# EAGLE board SparkFun_GNSS_mosaic-X5-Panel (EAGLE 9.6.2), part 1 of 3
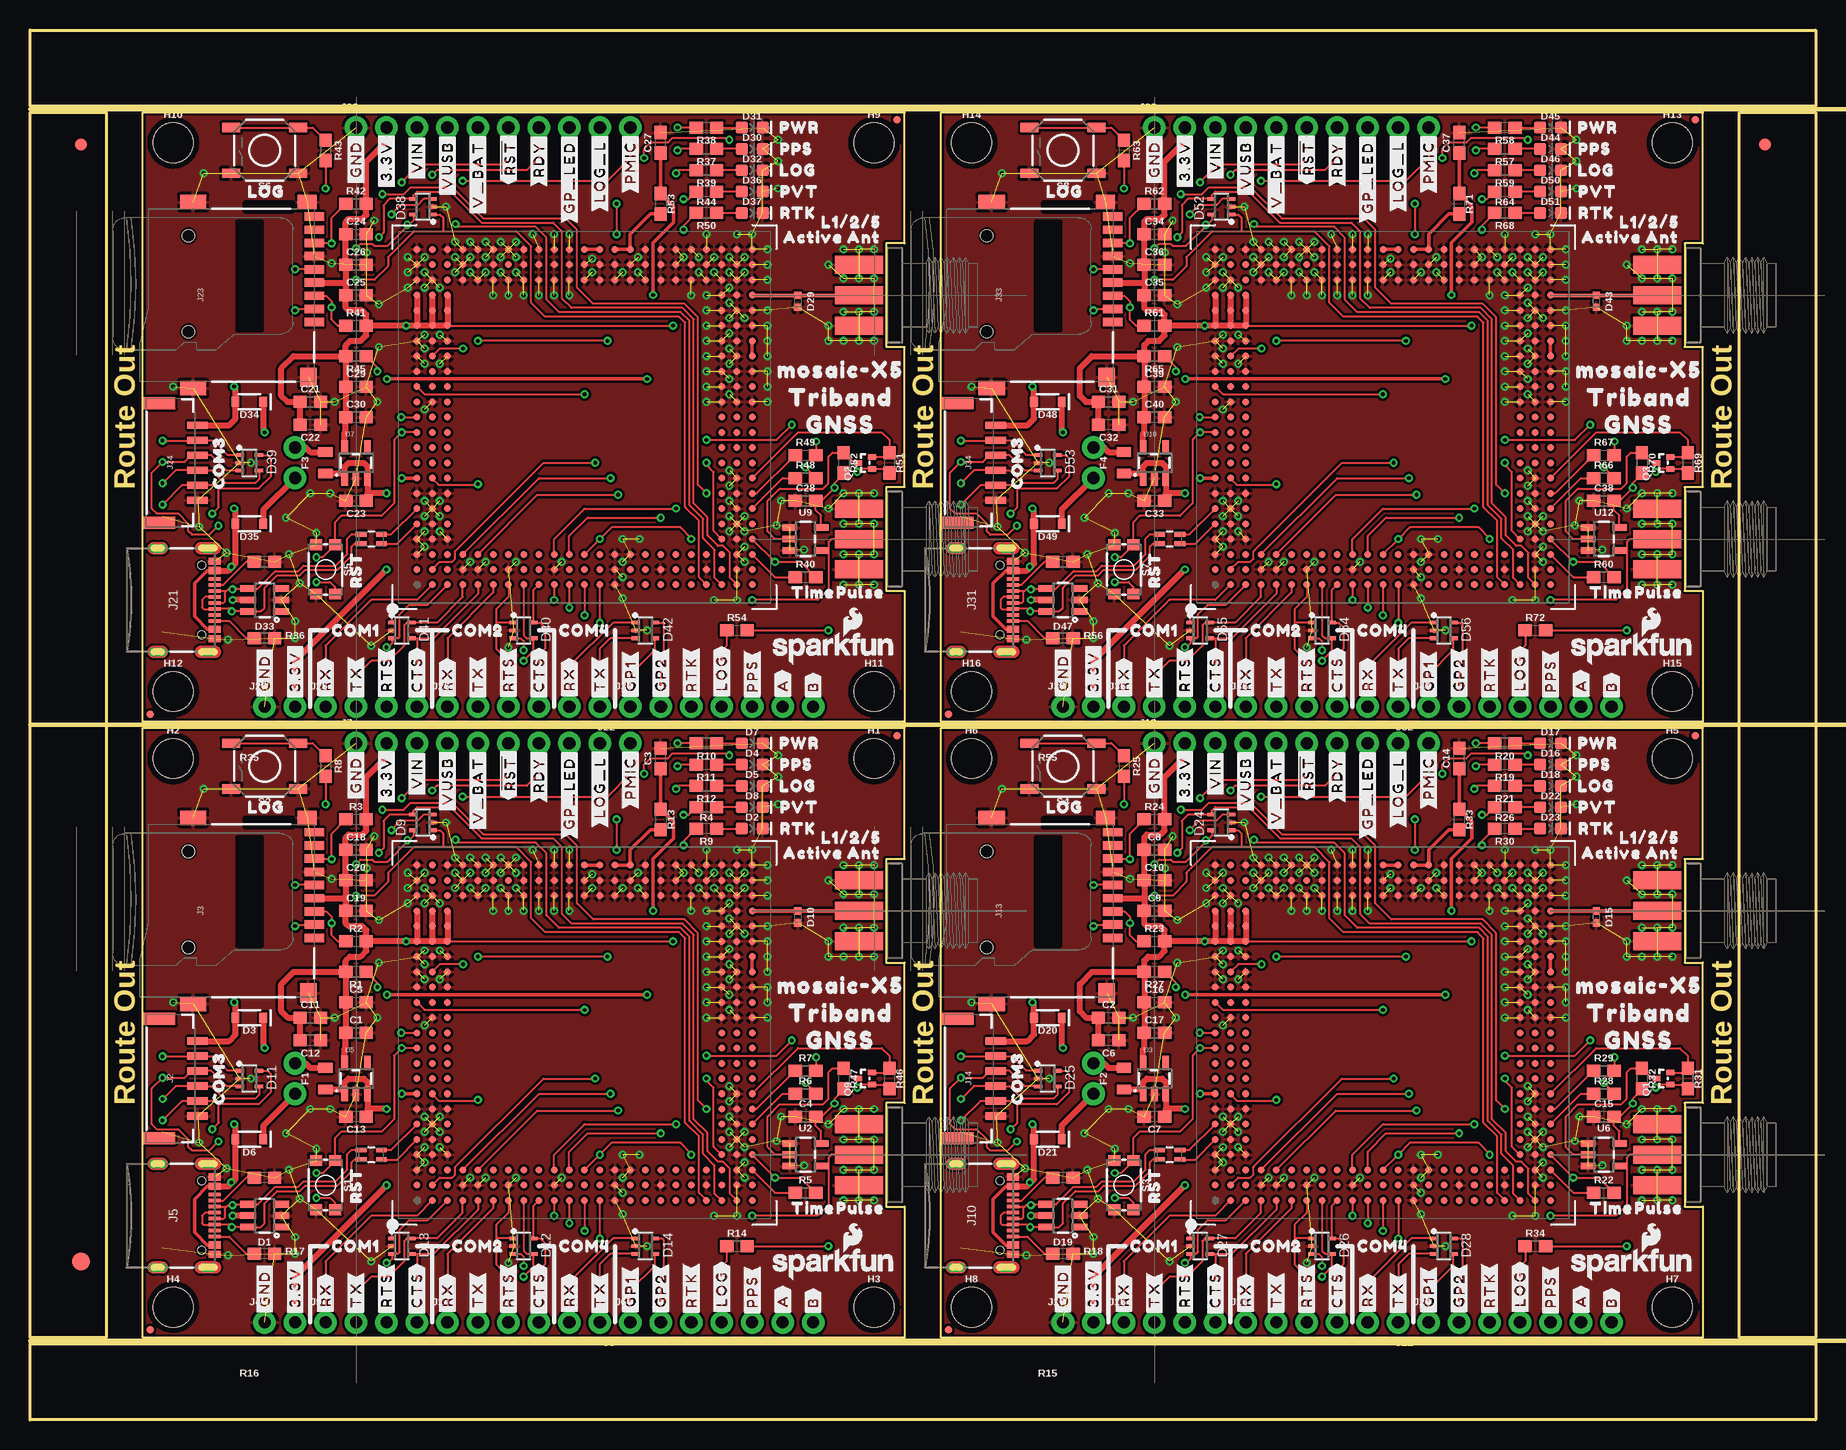
[diagram p0: board, top side]
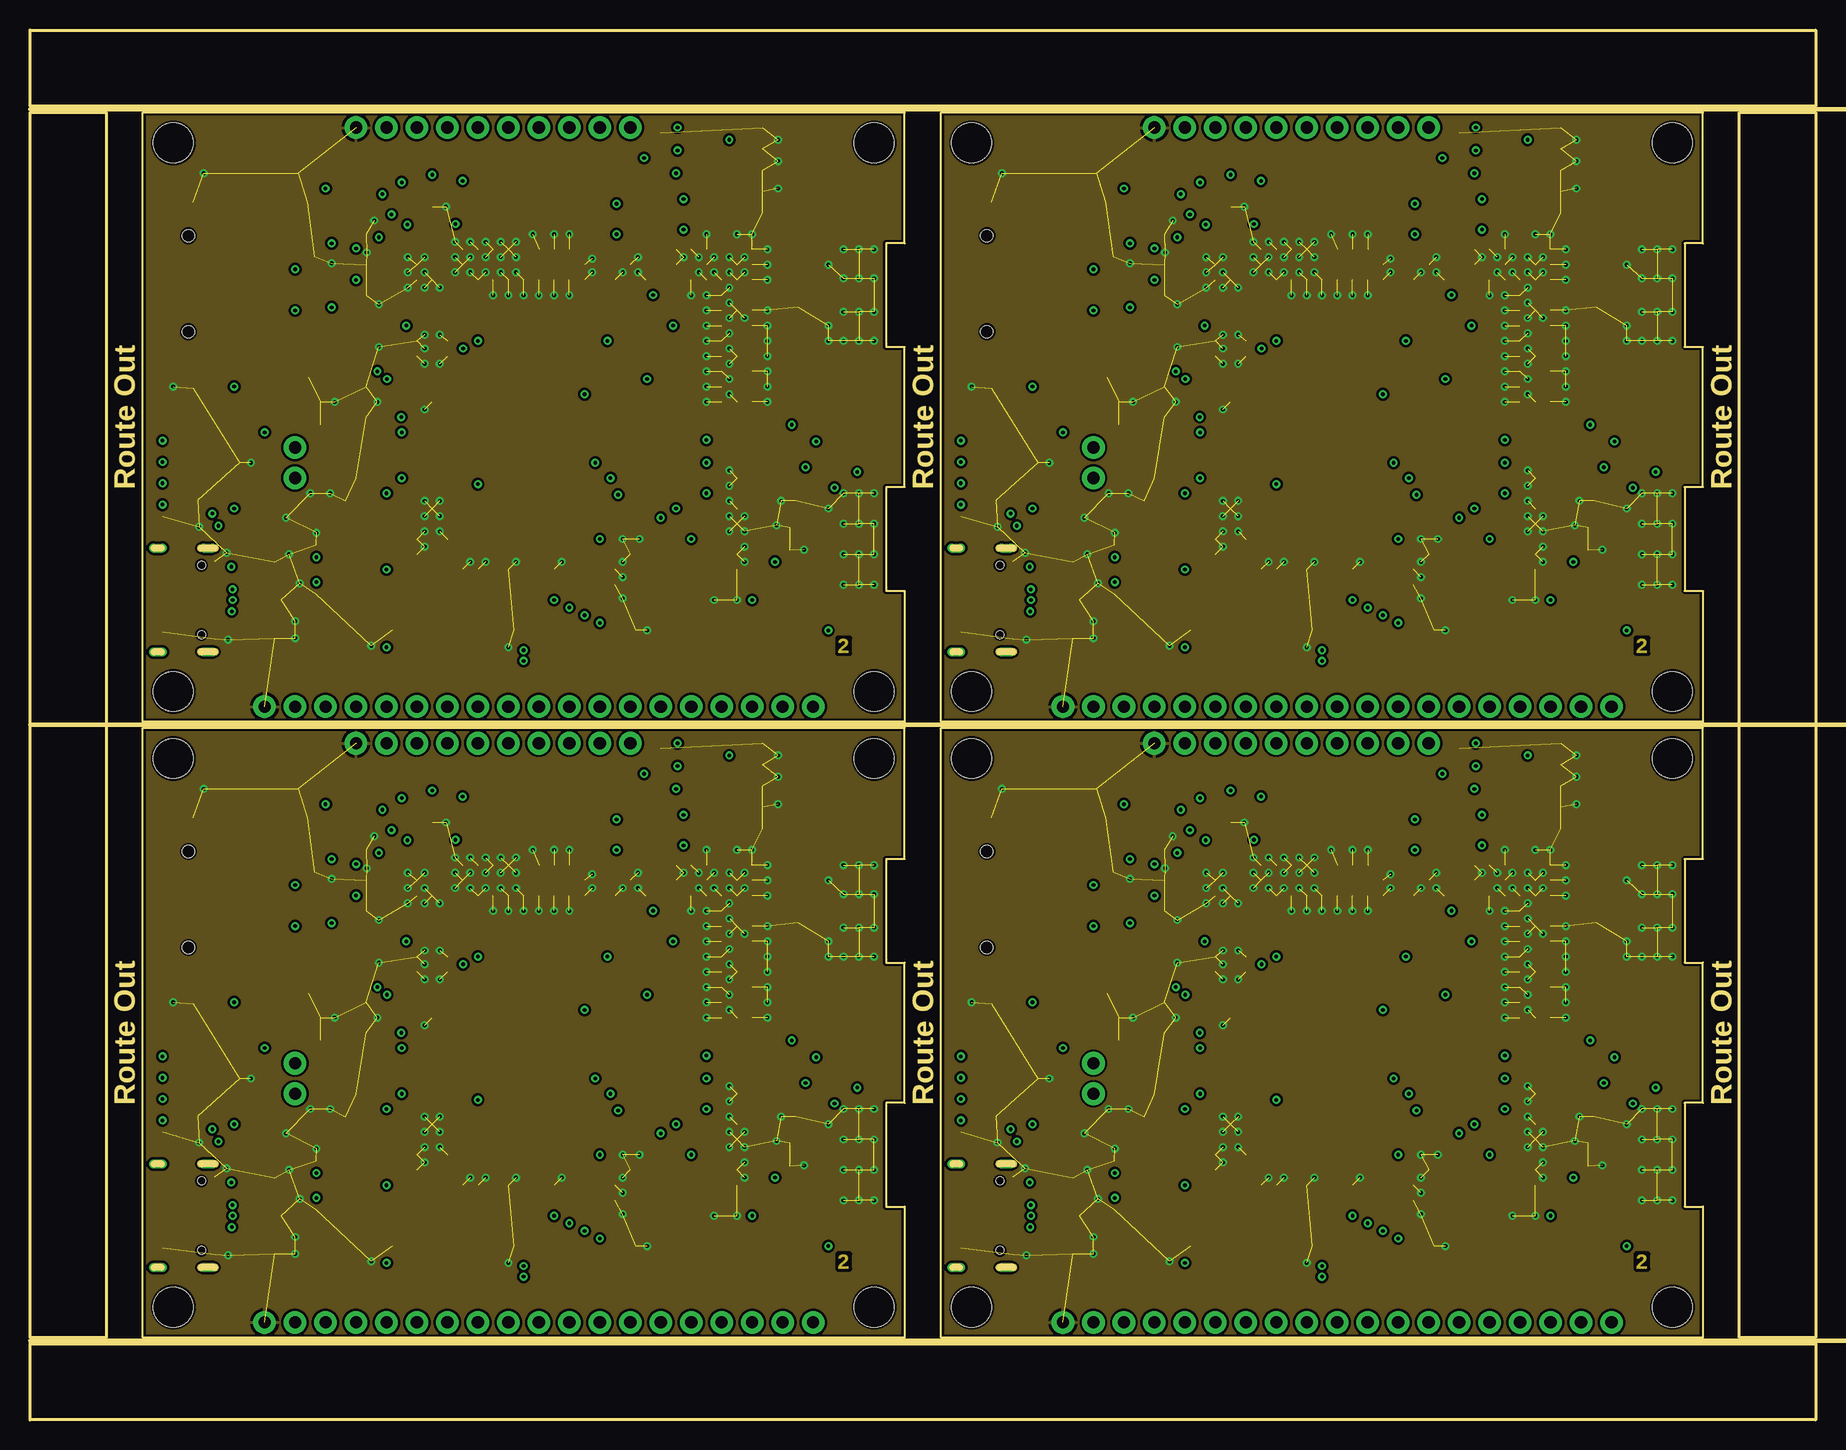
[diagram p1: board, inner layer Route2]
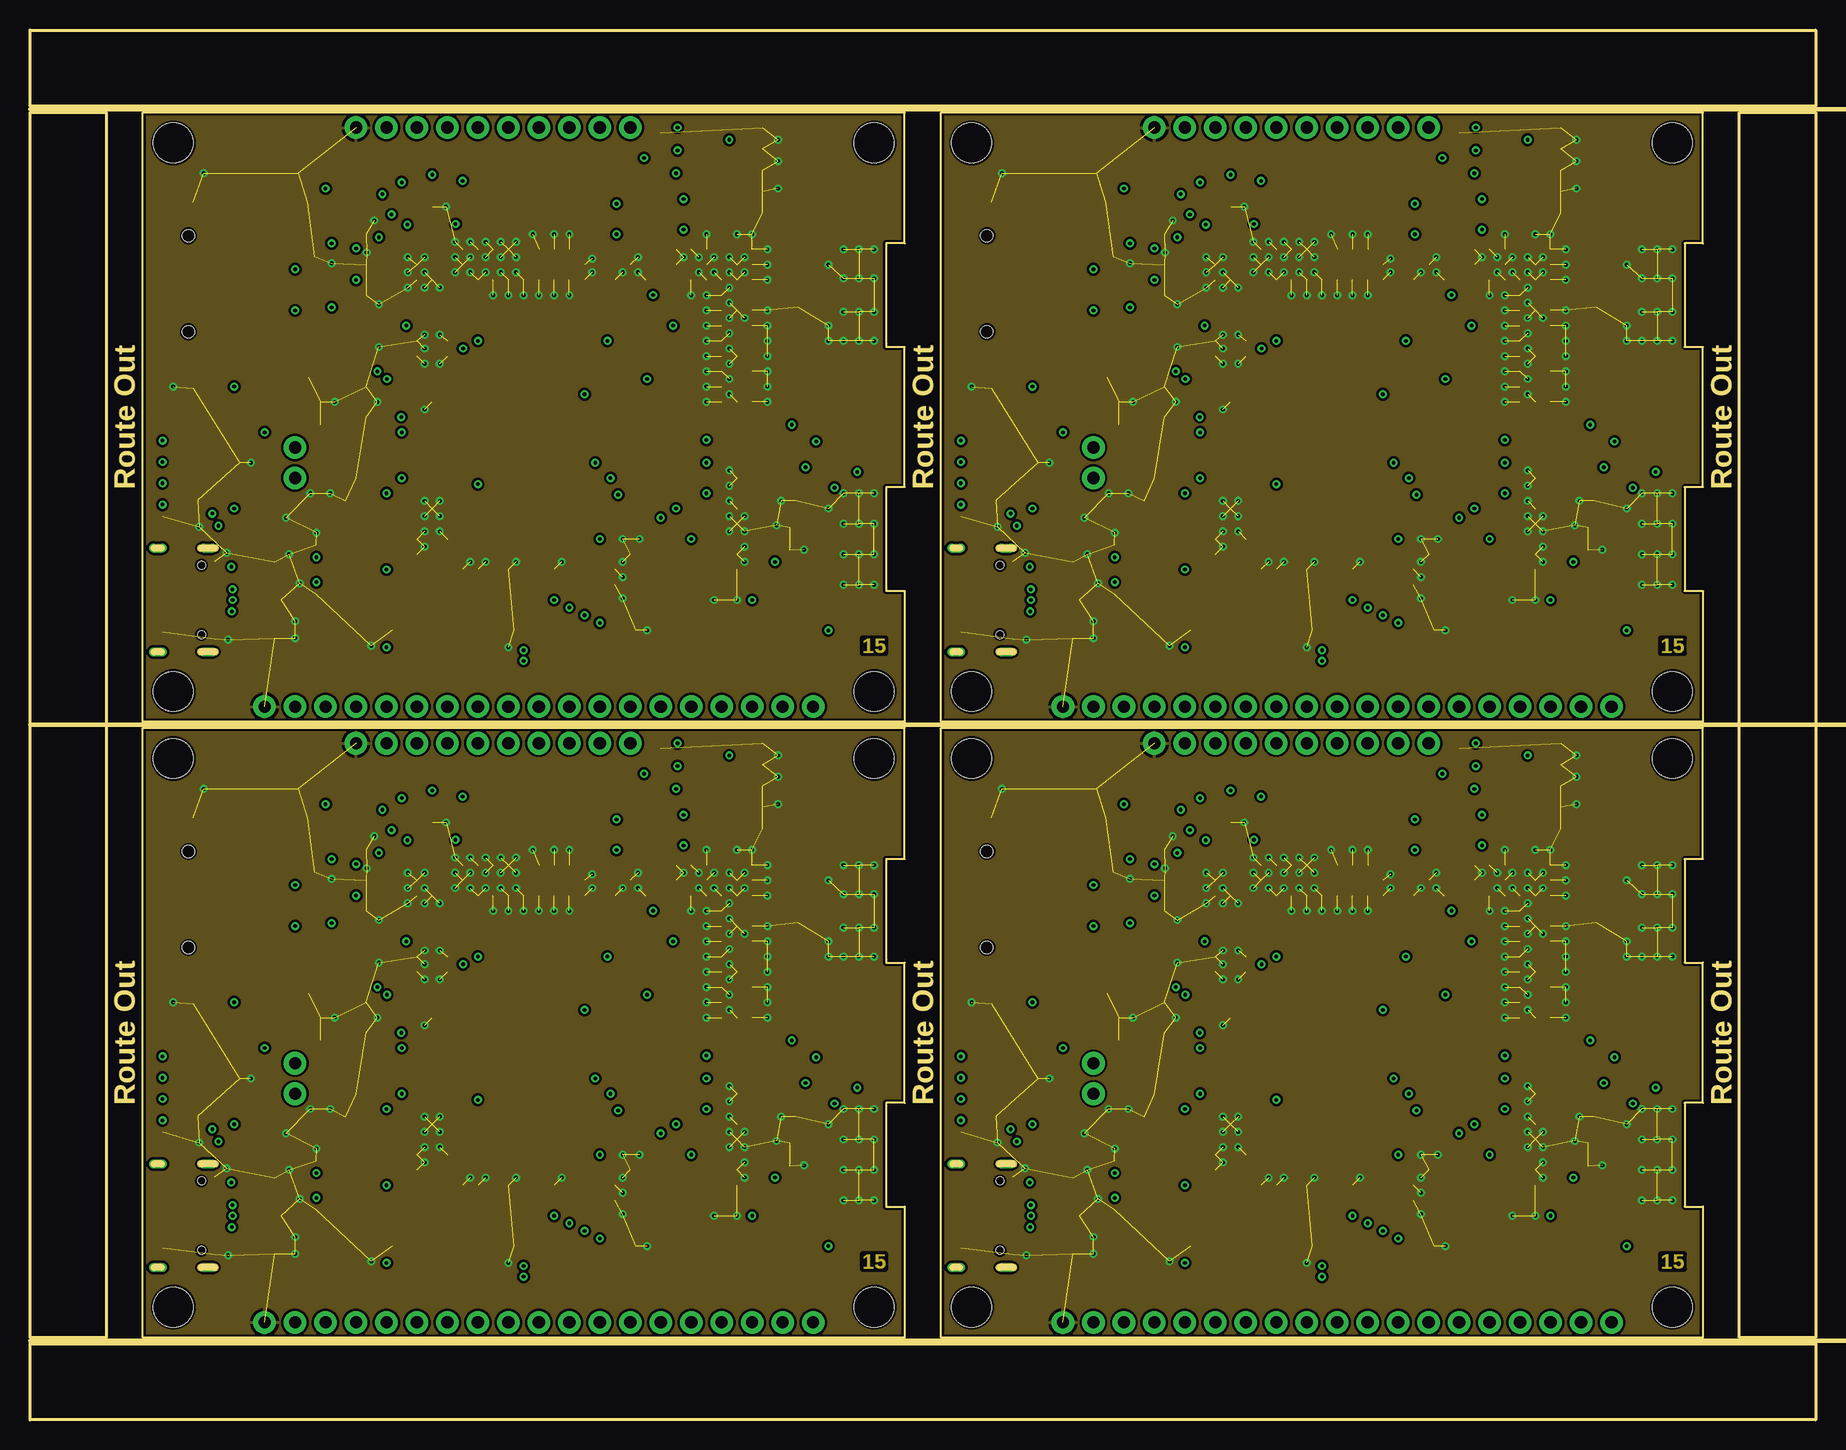
[diagram p2: board, inner layer Route15]
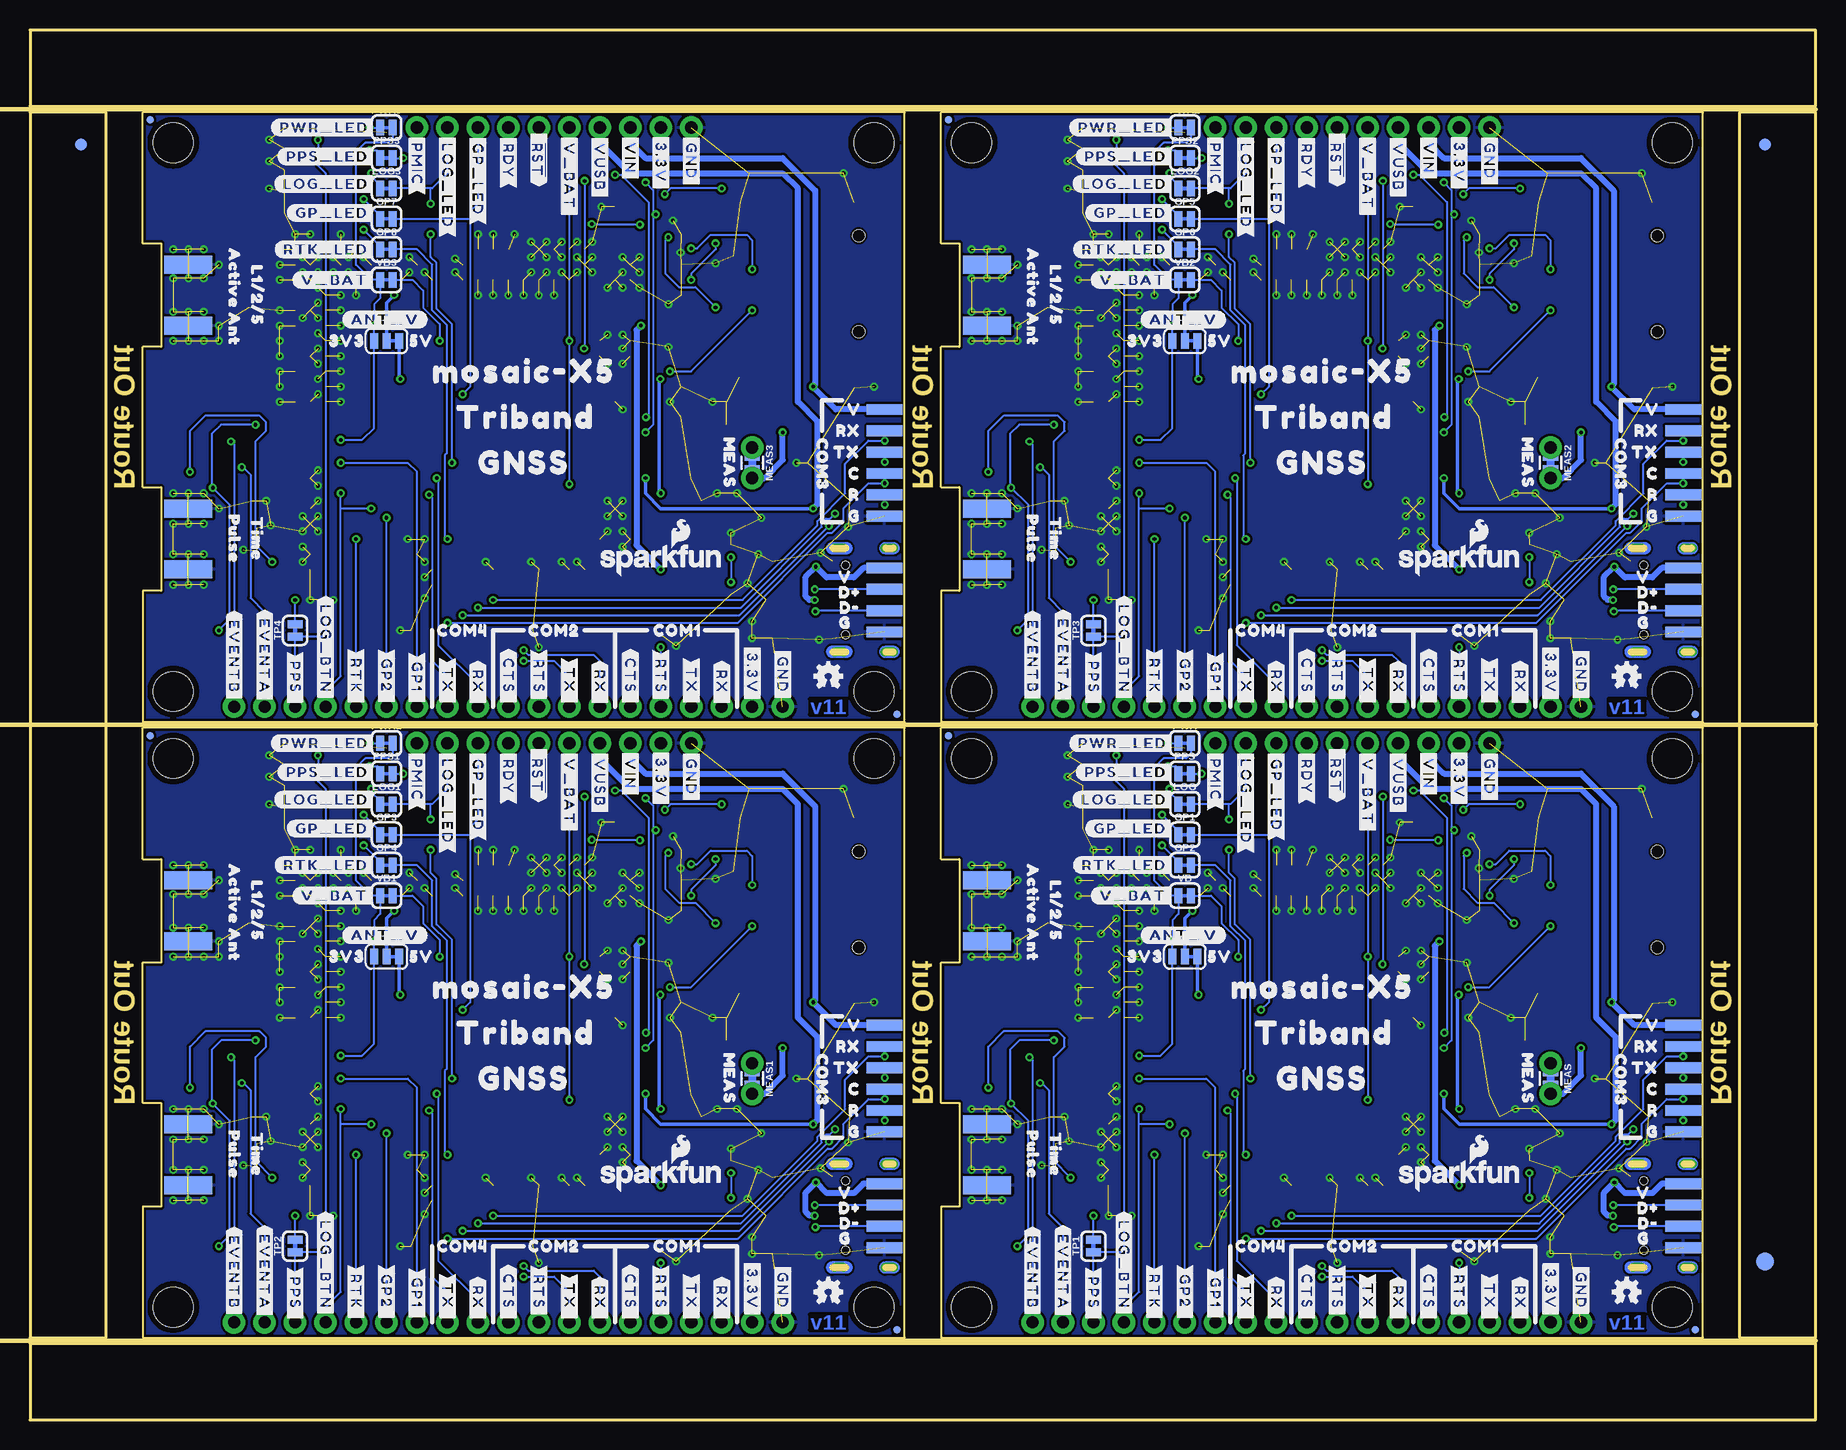
[diagram p3: board, bottom side, seen from below]

Size 148.84 x 115.82 mm. Coordinates in mm from the lower left corner, seen from the top.
Outline: 9.4,6.86 9.4,57.66 72.9,57.66 72.9,46.74 71.37,46.74 71.37,38.1 72.9,38.1 72.9,26.42 71.37,26.42 71.37,17.78 72.9,17.78 72.9,6.86 9.4,6.86
Outline: 75.95,6.86 75.95,57.66 139.45,57.66 139.45,46.74 137.92,46.74 137.92,38.1 139.45,38.1 139.45,26.42 137.92,26.42 137.92,17.78 139.45,17.78 139.45,6.86 75.95,6.86
Outline: 9.4,58.17 9.4,108.97 72.9,108.97 72.9,98.04 71.37,98.04 71.37,89.41 72.9,89.41 72.9,77.72 71.37,77.72 71.37,69.09 72.9,69.09 72.9,58.17 9.4,58.17
Outline: 75.95,58.17 75.95,108.97 139.45,108.97 139.45,98.04 137.92,98.04 137.92,89.41 139.45,89.41 139.45,77.72 137.92,77.72 137.92,69.09 139.45,69.09 139.45,58.17 75.95,58.17
Outline: 0,6.35 148.84,6.35 148.84,0 0,0 0,6.35
Outline: 142.49,108.97 148.84,108.97 148.84,6.86 142.49,6.86 142.49,108.97
Outline: 0,115.82 148.84,115.82 148.84,109.47 0,109.47 0,115.82
Outline: 0,108.97 6.35,108.97 6.35,6.86 0,6.86 0,108.97
Copper layers (1+2*15+16): Top 0.035559375mm / dielectric 0.47751875mm / Route2 0.035559375mm / dielectric 0.47751875mm / Route15 0.035559375mm / dielectric 0.47751875mm / Bottom 0.035559375mm
Design rules "SparkFun_GNSS_mosaic-X5": minimum track width 7mil, minimum drill 12mil, track to track 7mil, track to pad 7mil, pad to pad 7mil, via to via 7mil, smd to smd 7mil, copper to edge 7mil, drill to drill 7mil, minimum pad ring 7mil, minimum via ring 7mil, stop-mask expansion 3mil, vias tented up to drill 25mil, thermal gap 10mil
Net classes: 1 power: width 0.178 mm; 3 RF: width 0.349 mm, clearance 0.203 mm
Milling: 3 lines

## Footprints (pad centres in the part's own frame; a part is rotated, then mirrored left to right if it is on the bottom)
SMT-JUMPER_3_1-NC_TRACE_SILK = smd 0.66 x 1.27: 1 -1.041,0; 2 0,0; 3 1.041,0
0603 = smd 1.1 x 1: 1 -0.85,0; 2 0.85,0
SOT-23-6 = smd 0.55 x 1.35: 1 -0.95,-1.375; 2 0,-1.375; 3 0.95,-1.375; 4 0.95,1.375; 5 0,1.375; 6 -0.95,1.375
LED-0603 = smd 1 x 1: A -0.877,0; C 0.877,0
SOD-323 = smd 0.63 x 0.83: A 1.15,0; C -1.15,0
SOT353 = smd 0.3 x 0.7: 1 -0.65,-0.8; 2 0,-0.8; 3 0.65,-0.8; 4 0.65,0.8; 5 -0.65,0.8
0402-TIGHT = smd 0.6 x 0.6: 1 -0.5,0; 2 0.5,0
SMA-EDGE = smd 1.5 x 4: GND@0 -2.54,0; GND@1 2.54,0; SIG 0,0 | smd 1.5 x 4 bottom: GND@2 -2.54,0; GND@3 2.54,0
FIDUCIAL-1X2 = smd 1 x 1: 1 0,0
FIDUCIAL-1.5X3 = smd 1.5 x 1.5: 1 0,0
0805 = smd 0.8 x 1.2: 1 -0.9,0; 2 0.9,0
SMT-JUMPER_2_NC_TRACE_SILK = smd 0.66 x 1.27: 1 -0.521,0; 2 0.521,0
STAND-OFF = hole 3.302: 0,0
1X04_NO_SILK = drill 1.016 pad 1.88: 1 0,0; 2 2.54,0; 3 5.08,0; 4 7.62,0
JST-6-SMD-1.25MM-LOCKING = smd 0.6 x 1.7: 1 -3.125,3.3; 2 -1.875,3.3; 3 -0.625,3.3; 4 0.625,3.3; 5 1.875,3.3; 6 3.125,3.3 | smd 1 x 2.7: NC1 4.975,0.1; NC2 -4.975,0.1
MICROSD-EXTERNALPIN = smd 0.7 x 1.6: 1 2.25,10.5; 2 1.15,10.5; 3 0.05,10.5; 4 -1.05,10.5; 5 -2.15,10.5; 6 -3.25,10.5; 7 -4.35,10.5; 8 -5.45,10.5; 9 -6.55,10.5 | smd 1.2 x 1.6: 10 -7.75,9.9 | smd 1.2 x 2.2: 11 -7.75,0.4; 12 7.75,0.4 | smd 1.6 x 1.4: 13 6.85,10 | hole 1: 3.05,0; -4.95,0
1X02_NO_SILK = drill 1.016 pad 1.88: 1 0,0; 2 2.54,0
USB-C-16P_4LAYER-PADS = smd 0.3 x 1: A5 -1.25,-0.34; A6 -0.25,-0.34; A7 0.25,-0.34; A8 1.25,-0.34; B5 1.75,-0.34; B6 0.75,-0.34; B7 -0.75,-0.34; B8 -1.75,-0.34 | smd 0.6 x 1: GND -3.225,-0.34; GND2 3.225,-0.34; VBUS1 -2.45,-0.34; VBUS2 2.45,-0.34 | drill 0.4 pad 0.6 long: SHLD1 -4.318,-0.915; SHLD2 4.318,-0.915; SHLD3 -4.318,-5.095; SHLD4 4.318,-5.095 | hole 0.65: -2.89,-1.445; 2.89,-1.445
1X07_NO_SILK = drill 1.016 pad 1.88: 1 0,0; 2 2.54,0; 3 5.08,0; 4 7.62,0; 5 10.16,0; 6 12.7,0; 7 15.24,0
1X10_NO_SILK = drill 1.016 pad 1.88: 1 0,0; 2 2.54,0; 3 5.08,0; 4 7.62,0; 5 10.16,0; 6 12.7,0; 7 15.24,0; 8 17.78,0; 9 20.32,0; 10 22.86,0
1X06_SOLDER_PADS = smd 3 x 0.9: 1 0,4.445; 2 0,2.667; 3 0,0.889; 4 0,-0.889; 5 0,-2.667; 6 0,-4.445
USB-SOLDER-PADS = smd 3 x 0.9: D+ 0,-0.889; D- 0,0.889; GND 0,-2.667; VBUS 0,2.667
FIDUCIAL-MICRO = smd 0.635 x 0.635: 1 0,0
COMBO-JUMPER_2_NC_TRACE = smd 0.635 x 1.27: 1 -0.508,0; 2 0.508,0 | drill 1.016 pad 1.88: 3 -1.27,0; 4 1.27,0
SOT-416FL = smd 0.46 x 0.65: 1 -0.5,-1.1; 2 0.5,-1.1; 3 0,0.05
TACTILE_SWITCH_SMD_4.6X2.8MM = smd 0.9 x 1: 1 -2.05,-0.8; 2 2.05,-0.8; 3 2.05,0.8; 4 -2.05,0.8
TACTILE_SWITCH_SMD_5.2MM = smd 1.524 x 0.762: 1 -2.794,1.905; 2 2.794,1.905; 3 -2.794,-1.905; 4 2.794,-1.905
RFCMF1220100M4T = smd 0.9 x 0.4: A1 -0.85,0.4; A2 0.85,0.4; B1 -0.85,-0.4; B2 0.85,-0.4
MOSAIC_LGA = smd 0.6 x 0.6: A2 13.97,12.7; A3 13.97,11.43; A4 13.97,10.16; A5 13.97,8.89; A6 13.97,7.62; A7 13.97,6.35; A8 13.97,5.08; A9 13.97,3.81; A10 13.97,2.54; A11 13.97,1.27; A12 13.97,0; A13 13.97,-1.27; A14 13.97,-2.54; A15 13.97,-3.81; A16 13.97,-5.08; A17 13.97,-6.35; A18 13.97,-7.62; A19 13.97,-8.89; A20 13.97,-10.16; A21 13.97,-11.43; A22 13.97,-12.7; A23 13.97,-13.97; AA1 -11.43,13.97; AA2 -11.43,12.7; AA3 -11.43,11.43; AA4 -11.43,10.16; AA5 -11.43,8.89; AA6 -11.43,7.62; AA7 -11.43,6.35; AA8 -11.43,5.08; AA9 -11.43,3.81; AA10 -11.43,2.54; AA11 -11.43,1.27; AA12 -11.43,0; AA13 -11.43,-1.27; AA14 -11.43,-2.54; AA15 -11.43,-3.81; AA16 -11.43,-5.08; AA17 -11.43,-6.35; AA18 -11.43,-7.62; AA19 -11.43,-8.89; AA20 -11.43,-10.16; AA21 -11.43,-11.43; AA22 -11.43,-12.7; AA23 -11.43,-13.97; AB1 -12.7,13.97; AB2 -12.7,12.7; AB3 -12.7,11.43; AB4 -12.7,10.16; AB5 -12.7,8.89; AB6 -12.7,7.62; AB7 -12.7,6.35; AB8 -12.7,5.08; AB9 -12.7,3.81; AB10 -12.7,2.54; AB11 -12.7,1.27; AB12 -12.7,0; AB13 -12.7,-1.27; AB14 -12.7,-2.54; AB15 -12.7,-3.81; AB16 -12.7,-5.08; AB17 -12.7,-6.35; AB18 -12.7,-7.62; AB19 -12.7,-8.89; AB20 -12.7,-10.16; AB21 -12.7,-11.43; AB22 -12.7,-12.7; AB23 -12.7,-13.97; AC1 -13.97,13.97; AC2 -13.97,12.7; AC3 -13.97,11.43; AC4 -13.97,10.16; AC5 -13.97,8.89; AC6 -13.97,7.62; AC7 -13.97,6.35; AC8 -13.97,5.08; AC9 -13.97,3.81; AC10 -13.97,2.54; AC11 -13.97,1.27; AC12 -13.97,0; AC13 -13.97,-1.27; AC14 -13.97,-2.54; AC15 -13.97,-3.81; AC16 -13.97,-5.08; AC17 -13.97,-6.35; AC18 -13.97,-7.62; AC19 -13.97,-8.89; AC20 -13.97,-10.16; AC21 -13.97,-11.43; AC22 -13.97,-12.7; AC23 -13.97,-13.97; B1 12.7,13.97; B2 12.7,12.7; B3 12.7,11.43; B4 12.7,10.16; B5 12.7,8.89; B6 12.7,7.62; B7 12.7,6.35; B8 12.7,5.08; B9 12.7,3.81; B10 12.7,2.54; B11 12.7,1.27; B12 12.7,0; B13 12.7,-1.27; B14 12.7,-2.54; B15 12.7,-3.81; B16 12.7,-5.08; B17 12.7,-6.35; B18 12.7,-7.62; B19 12.7,-8.89; B20 12.7,-10.16; B21 12.7,-11.43; B22 12.7,-12.7; B23 12.7,-13.97; C1 11.43,13.97; C2 11.43,12.7; C3 11.43,11.43; C4 11.43,10.16; C5 11.43,8.89; C6 11.43,7.62; C7 11.43,6.35; C8 11.43,5.08; C9 11.43,3.81; C10 11.43,2.54; C11 11.43,1.27; C12 11.43,0; C13 11.43,-1.27; C14 11.43,-2.54; C15 11.43,-3.81; C16 11.43,-5.08; C17 11.43,-6.35; C18 11.43,-7.62; C19 11.43,-8.89; C20 11.43,-10.16; C21 11.43,-11.43; C22 11.43,-12.7; C23 11.43,-13.97; D1 10.16,13.97; D2 10.16,12.7; D3 10.16,11.43; D21 10.16,-11.43; D22 10.16,-12.7; D23 10.16,-13.97; E1 8.89,13.97; E2 8.89,12.7; E3 8.89,11.43; E21 8.89,-11.43; E22 8.89,-12.7; E23 8.89,-13.97; F1 7.62,13.97; F2 7.62,12.7; F3 7.62,11.43; F21 7.62,-11.43; F22 7.62,-12.7; F23 7.62,-13.97; G1 6.35,13.97; G2 6.35,12.7; G3 6.35,11.43; G21 6.35,-11.43; G22 6.35,-12.7; G23 6.35,-13.97; H1 5.08,13.97; H2 5.08,12.7; H3 5.08,11.43; H21 5.08,-11.43; H22 5.08,-12.7; H23 5.08,-13.97; J1 3.81,13.97; J2 3.81,12.7; J3 3.81,11.43; J21 3.81,-11.43; J22 3.81,-12.7; J23 3.81,-13.97; K1 2.54,13.97; K2 2.54,12.7; K3 2.54,11.43; K21 2.54,-11.43; K22 2.54,-12.7; K23 2.54,-13.97; L1 1.27,13.97; L2 1.27,12.7; L3 1.27,11.43; L21 1.27,-11.43; L22 1.27,-12.7; L23 1.27,-13.97; M1 0,13.97; M2 0,12.7; M3 0,11.43; M21 0,-11.43; M22 0,-12.7; M23 0,-13.97; N1 -1.27,13.97; N2 -1.27,12.7; N3 -1.27,11.43; N21 -1.27,-11.43; N22 -1.27,-12.7; N23 -1.27,-13.97; P1 -2.54,13.97; P2 -2.54,12.7; P3 -2.54,11.43; P21 -2.54,-11.43; P22 -2.54,-12.7; P23 -2.54,-13.97; R1 -3.81,13.97; R2 -3.81,12.7; R3 -3.81,11.43; R21 -3.81,-11.43; R22 -3.81,-12.7; R23 -3.81,-13.97; T1 -5.08,13.97; T2 -5.08,12.7; T3 -5.08,11.43; T21 -5.08,-11.43; T22 -5.08,-12.7; T23 -5.08,-13.97; U1 -6.35,13.97; U2 -6.35,12.7; U3 -6.35,11.43; U21 -6.35,-11.43; U22 -6.35,-12.7; U23 -6.35,-13.97; V1 -7.62,13.97; V2 -7.62,12.7; V3 -7.62,11.43; V21 -7.62,-11.43; V22 -7.62,-12.7; V23 -7.62,-13.97; W1 -8.89,13.97; W2 -8.89,12.7; W3 -8.89,11.43; W21 -8.89,-11.43; W22 -8.89,-12.7; W23 -8.89,-13.97; Y1 -10.16,13.97; Y2 -10.16,12.7; Y3 -10.16,11.43; Y21 -10.16,-11.43; Y22 -10.16,-12.7; Y23 -10.16,-13.97
SOT23-5 = smd 0.55 x 1.2: 1 -0.95,-1.3; 2 0,-1.3; 3 0.95,-1.3; 4 0.95,1.3; 5 -0.95,1.3

## Placement (x,y rotation side)
ANT_V  [SMT-JUMPER_3_1-NC_TRACE_SILK]  52.58,38.61 0 bottom
ANT_V1  [SMT-JUMPER_3_1-NC_TRACE_SILK]  119.13,38.61 0 bottom
ANT_V2  [SMT-JUMPER_3_1-NC_TRACE_SILK]  52.58,89.92 0 bottom
ANT_V3  [SMT-JUMPER_3_1-NC_TRACE_SILK]  119.13,89.92 0 bottom
C1  10uF  [0603]  27.18,32.26 0 top
C2  1.0uF  [0603]  89.92,33.53 0 top
C3  10uF  [0603]  52.58,55.12 90 top
C4  0.1uF  [0603]  64.64,25.27 0 top
C5  22uF  [0603]  27.18,34.8 0 top
C6  0.1uF  [0603]  89.92,31.62 180 top
C7  1.0uF  [0603]  93.73,25.27 180 top
C8  2.2uF  [0603]  93.73,47.5 0 top
C9  0.1uF  [0603]  93.73,42.42 0 top
C10  10uF  [0603]  93.73,44.96 0 top
C11  1.0uF  [0603]  23.37,33.53 0 top
C12  0.1uF  [0603]  23.37,31.62 180 top
C13  1.0uF  [0603]  27.18,25.27 180 top
C14  10uF  [0603]  119.13,55.12 90 top
C15  0.1uF  [0603]  131.19,25.27 0 top
C16  22uF  [0603]  93.73,34.8 0 top
C17  10uF  [0603]  93.73,32.26 0 top
C18  2.2uF  [0603]  27.18,47.5 0 top
C19  0.1uF  [0603]  27.18,42.42 0 top
C20  10uF  [0603]  27.18,44.96 0 top
C21  1.0uF  [0603]  23.37,84.84 0 top
C22  0.1uF  [0603]  23.37,82.93 180 top
C23  1.0uF  [0603]  27.18,76.58 180 top
C24  2.2uF  [0603]  27.18,98.81 0 top
C25  0.1uF  [0603]  27.18,93.73 0 top
C26  10uF  [0603]  27.18,96.27 0 top
C27  10uF  [0603]  52.58,106.43 90 top
C28  0.1uF  [0603]  64.64,76.58 0 top
C29  22uF  [0603]  27.18,86.11 0 top
C30  10uF  [0603]  27.18,83.57 0 top
C31  1.0uF  [0603]  89.92,84.84 0 top
C32  0.1uF  [0603]  89.92,82.93 180 top
C33  1.0uF  [0603]  93.73,76.58 180 top
C34  2.2uF  [0603]  93.73,98.81 0 top
C35  0.1uF  [0603]  93.73,93.73 0 top
C36  10uF  [0603]  93.73,96.27 0 top
C37  10uF  [0603]  119.13,106.43 90 top
C38  0.1uF  [0603]  131.19,76.58 0 top
C39  22uF  [0603]  93.73,86.11 0 top
C40  10uF  [0603]  93.73,83.57 0 top
D1  ESD Diode  [SOT-23-6]  19.56,17.02 90 top
D2  WHITE  [LED-0603]  60.2,49.28 0 top
D3  3A/10V/280mV  [SOD-323]  18.29,33.53 180 top
D4  Yellow  [LED-0603]  60.2,54.61 0 top
D5  GREEN  [LED-0603]  60.2,52.83 0 top
D6  3A/10V/280mV  [SOD-323]  18.29,23.37 180 top
D7  RED  [LED-0603]  60.2,56.39 0 top
D8  BLUE  [LED-0603]  60.2,51.05 0 top
D9  PESDXL4UGUG  [SOT353]  32.77,49.78 90 top
D10  PESD0402  [0402-TIGHT]  64.01,41.91 270 top
D11  PESDXL4UGUG  [SOT353]  18.29,28.45 270 top
D12  PESDXL4UGUG  [SOT353]  41.15,14.48 270 top
D13  PESDXL4UGUG  [SOT353]  30.99,14.48 270 top
D14  PESDXL4UGUG  [SOT353]  51.31,14.48 270 top
D15  PESD0402  [0402-TIGHT]  130.56,41.91 270 top
D16  Yellow  [LED-0603]  126.75,54.61 0 top
D17  RED  [LED-0603]  126.75,56.39 0 top
D18  GREEN  [LED-0603]  126.75,52.83 0 top
D19  ESD Diode  [SOT-23-6]  86.11,17.02 90 top
D20  3A/10V/280mV  [SOD-323]  84.84,33.53 180 top
D21  3A/10V/280mV  [SOD-323]  84.84,23.37 180 top
D22  BLUE  [LED-0603]  126.75,51.05 0 top
D23  WHITE  [LED-0603]  126.75,49.28 0 top
D24  PESDXL4UGUG  [SOT353]  99.31,49.78 90 top
D25  PESDXL4UGUG  [SOT353]  84.84,28.45 270 top
D26  PESDXL4UGUG  [SOT353]  107.7,14.48 270 top
D27  PESDXL4UGUG  [SOT353]  97.54,14.48 270 top
D28  PESDXL4UGUG  [SOT353]  117.86,14.48 270 top
D29  PESD0402  [0402-TIGHT]  64.01,93.22 270 top
D30  Yellow  [LED-0603]  60.2,105.92 0 top
D31  RED  [LED-0603]  60.2,107.7 0 top
D32  GREEN  [LED-0603]  60.2,104.14 0 top
D33  ESD Diode  [SOT-23-6]  19.56,68.33 90 top
D34  3A/10V/280mV  [SOD-323]  18.29,84.84 180 top
D35  3A/10V/280mV  [SOD-323]  18.29,74.68 180 top
D36  BLUE  [LED-0603]  60.2,102.36 0 top
D37  WHITE  [LED-0603]  60.2,100.58 0 top
D38  PESDXL4UGUG  [SOT353]  32.77,101.09 90 top
D39  PESDXL4UGUG  [SOT353]  18.29,79.76 270 top
D40  PESDXL4UGUG  [SOT353]  41.15,65.79 270 top
D41  PESDXL4UGUG  [SOT353]  30.99,65.79 270 top
D42  PESDXL4UGUG  [SOT353]  51.31,65.79 270 top
D43  PESD0402  [0402-TIGHT]  130.56,93.22 270 top
D44  Yellow  [LED-0603]  126.75,105.92 0 top
D45  RED  [LED-0603]  126.75,107.7 0 top
D46  GREEN  [LED-0603]  126.75,104.14 0 top
D47  ESD Diode  [SOT-23-6]  86.11,68.33 90 top
D48  3A/10V/280mV  [SOD-323]  84.84,84.84 180 top
D49  3A/10V/280mV  [SOD-323]  84.84,74.68 180 top
D50  BLUE  [LED-0603]  126.75,102.36 0 top
D51  WHITE  [LED-0603]  126.75,100.58 0 top
D52  PESDXL4UGUG  [SOT353]  99.31,101.09 90 top
D53  PESDXL4UGUG  [SOT353]  84.84,79.76 270 top
D54  PESDXL4UGUG  [SOT353]  107.7,65.79 270 top
D55  PESDXL4UGUG  [SOT353]  97.54,65.79 270 top
D56  PESDXL4UGUG  [SOT353]  117.86,65.79 270 top
E1  SMA  [SMA-EDGE]  69.09,42.42 270 top
E2  SMA  [SMA-EDGE]  69.09,22.1 270 top
E3  SMA  [SMA-EDGE]  135.64,42.42 270 top
E4  SMA  [SMA-EDGE]  135.64,22.1 270 top
E5  SMA  [SMA-EDGE]  69.09,93.73 270 top
E6  SMA  [SMA-EDGE]  69.09,73.41 270 top
E7  SMA  [SMA-EDGE]  135.64,93.73 270 top
E8  SMA  [SMA-EDGE]  135.64,73.41 270 top
E$1  [FIDUCIAL-1X2]  4.23,106.3 0 top
E$2  [FIDUCIAL-1X2]  4.23,106.3 0 bottom
E$3  [FIDUCIAL-1X2]  144.61,106.3 0 top
E$4  [FIDUCIAL-1X2]  144.61,106.3 0 bottom
E$5  [FIDUCIAL-1.5X3]  4.23,13.21 0 top
E$6  [FIDUCIAL-1.5X3]  4.23,13.21 0 bottom
F1  6V 0.5A  [0805]  24.64,28.45 90 top
F2  6V 0.5A  [0805]  91.19,28.45 90 top
F3  6V 0.5A  [0805]  24.64,79.76 90 top
F4  6V 0.5A  [0805]  91.19,79.76 90 top
GP1  JUMPER-SMT_2_NC_TRACE_SILK  [SMT-JUMPER_2_NC_TRACE_SILK]  52.58,48.77 0 bottom
GP2  JUMPER-SMT_2_NC_TRACE_SILK  [SMT-JUMPER_2_NC_TRACE_SILK]  52.58,46.23 0 bottom
GP3  JUMPER-SMT_2_NC_TRACE_SILK  [SMT-JUMPER_2_NC_TRACE_SILK]  119.13,48.77 0 bottom
GP4  JUMPER-SMT_2_NC_TRACE_SILK  [SMT-JUMPER_2_NC_TRACE_SILK]  119.13,46.23 0 bottom
GP5  JUMPER-SMT_2_NC_TRACE_SILK  [SMT-JUMPER_2_NC_TRACE_SILK]  52.58,100.08 0 bottom
GP6  JUMPER-SMT_2_NC_TRACE_SILK  [SMT-JUMPER_2_NC_TRACE_SILK]  52.58,97.54 0 bottom
GP7  JUMPER-SMT_2_NC_TRACE_SILK  [SMT-JUMPER_2_NC_TRACE_SILK]  119.13,100.08 0 bottom
GP8  JUMPER-SMT_2_NC_TRACE_SILK  [SMT-JUMPER_2_NC_TRACE_SILK]  119.13,97.54 0 bottom
H1  STAND-OFF  [STAND-OFF]  70.36,55.12 0 top
H2  STAND-OFF  [STAND-OFF]  11.94,55.12 0 top
H3  STAND-OFF  [STAND-OFF]  70.36,9.4 0 top
H4  STAND-OFF  [STAND-OFF]  11.94,9.4 0 top
H5  STAND-OFF  [STAND-OFF]  136.91,55.12 0 top
H6  STAND-OFF  [STAND-OFF]  78.49,55.12 0 top
H7  STAND-OFF  [STAND-OFF]  136.91,9.4 0 top
H8  STAND-OFF  [STAND-OFF]  78.49,9.4 0 top
H9  STAND-OFF  [STAND-OFF]  70.36,106.43 0 top
H10  STAND-OFF  [STAND-OFF]  11.94,106.43 0 top
H11  STAND-OFF  [STAND-OFF]  70.36,60.71 0 top
H12  STAND-OFF  [STAND-OFF]  11.94,60.71 0 top
H13  STAND-OFF  [STAND-OFF]  136.91,106.43 0 top
H14  STAND-OFF  [STAND-OFF]  78.49,106.43 0 top
H15  STAND-OFF  [STAND-OFF]  136.91,60.71 0 top
H16  STAND-OFF  [STAND-OFF]  78.49,60.71 0 top
J1  [1X04_NO_SILK]  34.8,8.13 0 top
J2  [JST-6-SMD-1.25MM-LOCKING]  10.67,28.45 270 top
J3  MICROSD  [MICROSD-EXTERNALPIN]  13.21,42.42 270 top
J4  [1X02_NO_SILK]  19.56,8.13 0 top
J5  USB Female Type C Connector  [USB-C-16P_4LAYER-PADS]  15.75,17.02 270 top
J6  [1X07_NO_SILK]  50.04,8.13 0 top
J7  [1X10_NO_SILK]  27.18,56.39 0 top
J8  [1X02_NO_SILK]  47.5,8.13 180 top
J9  [1X04_NO_SILK]  24.64,8.13 0 top
J10  USB Female Type C Connector  [USB-C-16P_4LAYER-PADS]  82.3,17.02 270 top
J11  [1X02_NO_SILK]  114.05,8.13 180 top
J12  [1X06_SOLDER_PADS]  11.05,28.45 0 bottom
J13  MICROSD  [MICROSD-EXTERNALPIN]  79.76,42.42 270 top
J14  [JST-6-SMD-1.25MM-LOCKING]  77.22,28.45 270 top
J15  [1X04_NO_SILK]  91.19,8.13 0 top
J16  [1X04_NO_SILK]  101.35,8.13 0 top
J17  [1X02_NO_SILK]  86.11,8.13 0 top
J18  [1X10_NO_SILK]  93.73,56.39 0 top
J19  [1X06_SOLDER_PADS]  77.6,28.45 0 bottom
J20  [1X07_NO_SILK]  116.59,8.13 0 top
J21  USB Female Type C Connector  [USB-C-16P_4LAYER-PADS]  15.75,68.33 270 top
J22  [1X02_NO_SILK]  47.5,59.44 180 top
J23  MICROSD  [MICROSD-EXTERNALPIN]  13.21,93.73 270 top
J24  [JST-6-SMD-1.25MM-LOCKING]  10.67,79.76 270 top
J25  [1X04_NO_SILK]  24.64,59.44 0 top
J26  [1X04_NO_SILK]  34.8,59.44 0 top
J27  [1X02_NO_SILK]  19.56,59.44 0 top
J28  [1X10_NO_SILK]  27.18,107.7 0 top
J29  [1X06_SOLDER_PADS]  11.05,79.76 0 bottom
J30  [1X07_NO_SILK]  50.04,59.44 0 top
J31  USB Female Type C Connector  [USB-C-16P_4LAYER-PADS]  82.3,68.33 270 top
J32  [1X02_NO_SILK]  114.05,59.44 180 top
J33  MICROSD  [MICROSD-EXTERNALPIN]  79.76,93.73 270 top
J34  [JST-6-SMD-1.25MM-LOCKING]  77.22,79.76 270 top
J35  [1X04_NO_SILK]  91.19,59.44 0 top
J36  [1X04_NO_SILK]  101.35,59.44 0 top
J37  [1X02_NO_SILK]  86.11,59.44 0 top
J38  [1X10_NO_SILK]  93.73,107.7 0 top
J39  [1X06_SOLDER_PADS]  77.6,79.76 0 bottom
J40  [1X07_NO_SILK]  116.59,59.44 0 top
JP1  USB_SOLDER_PADS  [USB-SOLDER-PADS]  11.05,17.02 0 bottom
JP2  FIDUCIALUFIDUCIAL  [FIDUCIAL-MICRO]  138.81,57.02 0 top
JP3  FIDUCIALUFIDUCIAL  [FIDUCIAL-MICRO]  76.58,7.49 0 top
JP4  FIDUCIALUFIDUCIAL  [FIDUCIAL-MICRO]  138.81,57.02 0 bottom
JP5  FIDUCIALUFIDUCIAL  [FIDUCIAL-MICRO]  76.58,7.49 0 bottom
JP6  USB_SOLDER_PADS  [USB-SOLDER-PADS]  77.6,17.02 0 bottom
JP7  FIDUCIALUFIDUCIAL  [FIDUCIAL-MICRO]  72.26,108.33 0 top
JP8  FIDUCIALUFIDUCIAL  [FIDUCIAL-MICRO]  10.03,58.8 0 top
JP9  FIDUCIALUFIDUCIAL  [FIDUCIAL-MICRO]  72.26,108.33 0 bottom
JP10  FIDUCIALUFIDUCIAL  [FIDUCIAL-MICRO]  10.03,58.8 0 bottom
JP11  USB_SOLDER_PADS  [USB-SOLDER-PADS]  11.05,68.33 0 bottom
JP12  FIDUCIALUFIDUCIAL  [FIDUCIAL-MICRO]  138.81,108.33 0 top
JP13  FIDUCIALUFIDUCIAL  [FIDUCIAL-MICRO]  76.58,58.8 0 top
JP14  FIDUCIALUFIDUCIAL  [FIDUCIAL-MICRO]  138.81,108.33 0 bottom
JP15  FIDUCIALUFIDUCIAL  [FIDUCIAL-MICRO]  76.58,58.8 0 bottom
JP16  USB_SOLDER_PADS  [USB-SOLDER-PADS]  77.6,68.33 0 bottom
JP21  FIDUCIALUFIDUCIAL  [FIDUCIAL-MICRO]  72.26,57.02 0 top
JP61  FIDUCIALUFIDUCIAL  [FIDUCIAL-MICRO]  10.03,7.49 0 top
JP71  FIDUCIALUFIDUCIAL  [FIDUCIAL-MICRO]  72.26,57.02 0 bottom
JP81  FIDUCIALUFIDUCIAL  [FIDUCIAL-MICRO]  10.03,7.49 0 bottom
LOG  JUMPER-SMT_2_NC_TRACE_SILK  [SMT-JUMPER_2_NC_TRACE_SILK]  52.58,51.31 0 bottom
LOG1  JUMPER-SMT_2_NC_TRACE_SILK  [SMT-JUMPER_2_NC_TRACE_SILK]  119.13,51.31 0 bottom
LOG2  JUMPER-SMT_2_NC_TRACE_SILK  [SMT-JUMPER_2_NC_TRACE_SILK]  52.58,102.62 0 bottom
LOG3  JUMPER-SMT_2_NC_TRACE_SILK  [SMT-JUMPER_2_NC_TRACE_SILK]  119.13,102.62 0 bottom
LOGO1  SFE_LOGO_NAME_FLAME10_MM  [SFE_LOGO_NAME_FLAME_10MM]  29.72,20.45 0 bottom
LOGO2  OSHW-LOGOMINI  [OSHW-LOGO-MINI]  15.75,10.67 0 bottom
LOGO3  SFE_LOGO_NAME_FLAME10_MM  [SFE_LOGO_NAME_FLAME_10MM]  133.48,13.08 0 top
LOGO4  SFE_LOGO_NAME_FLAME10_MM  [SFE_LOGO_NAME_FLAME_10MM]  66.93,13.08 0 top
LOGO5  OSHW-LOGOMINI  [OSHW-LOGO-MINI]  82.3,10.67 0 bottom
LOGO6  SFE_LOGO_NAME_FLAME10_MM  [SFE_LOGO_NAME_FLAME_10MM]  96.27,20.45 0 bottom
LOGO7  SFE_LOGO_NAME_FLAME10_MM  [SFE_LOGO_NAME_FLAME_10MM]  66.93,64.39 0 top
LOGO8  OSHW-LOGOMINI  [OSHW-LOGO-MINI]  15.75,61.98 0 bottom
LOGO9  SFE_LOGO_NAME_FLAME10_MM  [SFE_LOGO_NAME_FLAME_10MM]  29.72,71.76 0 bottom
LOGO10  SFE_LOGO_NAME_FLAME10_MM  [SFE_LOGO_NAME_FLAME_10MM]  133.48,64.39 0 top
LOGO11  OSHW-LOGOMINI  [OSHW-LOGO-MINI]  82.3,61.98 0 bottom
LOGO12  SFE_LOGO_NAME_FLAME10_MM  [SFE_LOGO_NAME_FLAME_10MM]  96.27,71.76 0 bottom
MEAS  JUMPER-COMBO_2_NC_TRACE  [COMBO-JUMPER_2_NC_TRACE]  22.1,28.45 270 bottom
MEAS1  JUMPER-COMBO_2_NC_TRACE  [COMBO-JUMPER_2_NC_TRACE]  88.65,28.45 270 bottom
MEAS2  JUMPER-COMBO_2_NC_TRACE  [COMBO-JUMPER_2_NC_TRACE]  22.1,79.76 270 bottom
MEAS3  JUMPER-COMBO_2_NC_TRACE  [COMBO-JUMPER_2_NC_TRACE]  88.65,79.76 270 bottom
PPS  JUMPER-SMT_2_NC_TRACE_SILK  [SMT-JUMPER_2_NC_TRACE_SILK]  52.58,53.85 0 bottom
PPS1  JUMPER-SMT_2_NC_TRACE_SILK  [SMT-JUMPER_2_NC_TRACE_SILK]  119.13,53.85 0 bottom
PPS2  JUMPER-SMT_2_NC_TRACE_SILK  [SMT-JUMPER_2_NC_TRACE_SILK]  52.58,105.16 0 bottom
PPS3  JUMPER-SMT_2_NC_TRACE_SILK  [SMT-JUMPER_2_NC_TRACE_SILK]  119.13,105.16 0 bottom
PWR  JUMPER-SMT_2_NC_TRACE_SILK  [SMT-JUMPER_2_NC_TRACE_SILK]  52.58,56.39 0 bottom
PWR1  JUMPER-SMT_2_NC_TRACE_SILK  [SMT-JUMPER_2_NC_TRACE_SILK]  119.13,56.39 0 bottom
PWR2  JUMPER-SMT_2_NC_TRACE_SILK  [SMT-JUMPER_2_NC_TRACE_SILK]  52.58,107.7 0 bottom
PWR3  JUMPER-SMT_2_NC_TRACE_SILK  [SMT-JUMPER_2_NC_TRACE_SILK]  119.13,107.7 0 bottom
Q1  20V/0.2A/8MHz/1.2Ω/1Vth  [SOT-416FL]  135.64,28.45 90 top
Q2  20V/0.2A/8MHz/1.2Ω/1Vth  [SOT-416FL]  69.09,79.76 90 top
Q3  20V/0.2A/8MHz/1.2Ω/1Vth  [SOT-416FL]  135.64,79.76 90 top
Q9  20V/0.2A/8MHz/1.2Ω/1Vth  [SOT-416FL]  69.09,28.45 90 top
R1  10k  [0603]  27.18,37.34 180 top
R2  10k  [0603]  27.18,39.88 0 top
R3  10k  [0603]  27.18,50.04 0 top
R4  2.2k  [0603]  56.39,51.05 180 top
R5  10k  [0603]  64.64,18.92 0 top
R6  169K  [0603]  64.64,27.18 0 top
R7  169K  [0603]  64.64,29.08 0 top
R8  1k  [0603]  24.64,54.48 270 top
R9  1k  [0603]  56.39,49.28 180 top
R10  1k  [0603]  56.39,56.39 180 top
R11  2.2k  [0603]  56.39,54.61 180 top
R12  330  [0603]  56.39,52.83 180 top
R13  0  [0603]  52.58,50.04 270 top
R14  10k  [0603]  58.93,14.48 0 top
R15  5.1k  [0603]  86.11,13.84 180 top
R16  5.1k  [0603]  19.56,13.84 180 top
R17  5.1k  [0603]  19.56,20.19 180 top
R18  5.1k  [0603]  86.11,20.19 180 top
R19  2.2k  [0603]  122.94,54.61 180 top
R20  1k  [0603]  122.94,56.39 180 top
R21  330  [0603]  122.94,52.83 180 top
R22  10k  [0603]  131.19,18.92 0 top
R23  10k  [0603]  93.73,39.88 0 top
R24  10k  [0603]  93.73,50.04 0 top
R25  1k  [0603]  91.19,54.48 270 top
R26  2.2k  [0603]  122.94,51.05 180 top
R27  10k  [0603]  93.73,37.34 180 top
R28  169K  [0603]  131.19,27.18 0 top
R29  169K  [0603]  131.19,29.08 0 top
R30  1k  [0603]  122.94,49.28 180 top
R31  2.2k  [0603]  138.18,28.45 270 top
R32  2.2k  [0603]  134.37,28.45 270 top
R33  0  [0603]  119.13,50.04 270 top
R34  10k  [0603]  125.48,14.48 0 top
R35  5.1k  [0603]  19.56,65.15 180 top
R36  5.1k  [0603]  19.56,71.5 180 top
R37  2.2k  [0603]  56.39,105.92 180 top
R38  1k  [0603]  56.39,107.7 180 top
R39  330  [0603]  56.39,104.14 180 top
R40  10k  [0603]  64.64,70.23 0 top
R41  10k  [0603]  27.18,91.19 0 top
R42  10k  [0603]  27.18,101.35 0 top
R43  1k  [0603]  24.64,105.79 270 top
R44  2.2k  [0603]  56.39,102.36 180 top
R45  10k  [0603]  27.18,88.65 180 top
R46  2.2k  [0603]  71.63,28.45 270 top
R47  2.2k  [0603]  67.82,28.45 270 top
R48  169K  [0603]  64.64,78.49 0 top
R49  169K  [0603]  64.64,80.39 0 top
R50  1k  [0603]  56.39,100.58 180 top
R51  2.2k  [0603]  71.63,79.76 270 top
R52  2.2k  [0603]  67.82,79.76 270 top
R53  0  [0603]  52.58,101.35 270 top
R54  10k  [0603]  58.93,65.79 0 top
R55  5.1k  [0603]  86.11,65.15 180 top
R56  5.1k  [0603]  86.11,71.5 180 top
R57  2.2k  [0603]  122.94,105.92 180 top
R58  1k  [0603]  122.94,107.7 180 top
R59  330  [0603]  122.94,104.14 180 top
R60  10k  [0603]  131.19,70.23 0 top
R61  10k  [0603]  93.73,91.19 0 top
R62  10k  [0603]  93.73,101.35 0 top
R63  1k  [0603]  91.19,105.79 270 top
R64  2.2k  [0603]  122.94,102.36 180 top
R65  10k  [0603]  93.73,88.65 180 top
R66  169K  [0603]  131.19,78.49 0 top
R67  169K  [0603]  131.19,80.39 0 top
R68  1k  [0603]  122.94,100.58 180 top
R69  2.2k  [0603]  138.18,79.76 270 top
R70  2.2k  [0603]  134.37,79.76 270 top
R71  0  [0603]  119.13,101.35 270 top
R72  10k  [0603]  125.48,65.79 0 top
S1  MOMENTARY-SWITCH-SPST-SMD-4.6X2.8MM  [TACTILE_SWITCH_SMD_4.6X2.8MM]  24.64,19.56 270 top
S2  MOMENTARY-SWITCH-SPST-SMD-5.2-TALL-REDUNDANT  [TACTILE_SWITCH_SMD_5.2MM]  19.56,54.48 180 top
S3  MOMENTARY-SWITCH-SPST-SMD-4.6X2.8MM  [TACTILE_SWITCH_SMD_4.6X2.8MM]  91.19,19.56 270 top
S4  MOMENTARY-SWITCH-SPST-SMD-5.2-TALL-REDUNDANT  [TACTILE_SWITCH_SMD_5.2MM]  86.11,54.48 180 top
S5  MOMENTARY-SWITCH-SPST-SMD-4.6X2.8MM  [TACTILE_SWITCH_SMD_4.6X2.8MM]  24.64,70.87 270 top
S6  MOMENTARY-SWITCH-SPST-SMD-5.2-TALL-REDUNDANT  [TACTILE_SWITCH_SMD_5.2MM]  19.56,105.79 180 top
S7  MOMENTARY-SWITCH-SPST-SMD-4.6X2.8MM  [TACTILE_SWITCH_SMD_4.6X2.8MM]  91.19,70.87 270 top
S8  MOMENTARY-SWITCH-SPST-SMD-5.2-TALL-REDUNDANT  [TACTILE_SWITCH_SMD_5.2MM]  86.11,105.79 180 top
T1  RFCMF1220100M4T  [RFCMF1220100M4T]  28.45,22.1 0 top
T2  RFCMF1220100M4T  [RFCMF1220100M4T]  95,22.1 0 top
T3  RFCMF1220100M4T  [RFCMF1220100M4T]  28.45,73.41 0 top
T4  RFCMF1220100M4T  [RFCMF1220100M4T]  95,73.41 0 top
TP1  JUMPER-SMT_2_NC_TRACE_SILK  [SMT-JUMPER_2_NC_TRACE_SILK]  60.2,14.48 90 bottom
TP2  JUMPER-SMT_2_NC_TRACE_SILK  [SMT-JUMPER_2_NC_TRACE_SILK]  126.75,14.48 90 bottom
TP3  JUMPER-SMT_2_NC_TRACE_SILK  [SMT-JUMPER_2_NC_TRACE_SILK]  60.2,65.79 90 bottom
TP4  JUMPER-SMT_2_NC_TRACE_SILK  [SMT-JUMPER_2_NC_TRACE_SILK]  126.75,65.79 90 bottom
U1  MOSAIC-X5X5  [MOSAIC_LGA]  46.23,32.26 180 top
U2  SN74AHC1G125DBVR  [SOT23-5]  64.64,22.1 270 top
U3  3.3V  [SOT23-5]  93.73,28.45 0 top
U4  MOSAIC-X5X5  [MOSAIC_LGA]  112.78,32.26 180 top
U5  3.3V  [SOT23-5]  27.18,28.45 0 top
U6  SN74AHC1G125DBVR  [SOT23-5]  131.19,22.1 270 top
U7  3.3V  [SOT23-5]  27.18,79.76 0 top
U8  MOSAIC-X5X5  [MOSAIC_LGA]  46.23,83.57 180 top
U9  SN74AHC1G125DBVR  [SOT23-5]  64.64,73.41 270 top
U10  3.3V  [SOT23-5]  93.73,79.76 0 top
U11  MOSAIC-X5X5  [MOSAIC_LGA]  112.78,83.57 180 top
U12  SN74AHC1G125DBVR  [SOT23-5]  131.19,73.41 270 top
U$1  [V0]  13.59,32.89 0 bottom
U$2  [TIME0]  131.83,17.65 0 top
U$3  [GNSS_1]  40.77,28.45 0 bottom
U$4  [TRIBAND_2]  40.64,32.26 0 bottom
U$5  [MEAS0]  24,28.45 270 bottom
U$6  [_ACTIVE_ANT1]  66.67,47.24 0 top
U$7  [#RTK#0]  55.12,10.79 90 top
U$8  [C4]  13.59,27.56 0 bottom
U$9  [D#2]  13.97,17.65 0 bottom
U$10  [D#3]  13.97,16.38 0 bottom
U$11  [G0]  14.35,15.11 0 bottom
U$12  [R5]  13.59,25.78 0 bottom
U$13  [RST0]  27.18,19.56 90 top
U$14  [RX7]  14.1,31.12 0 bottom
U$15  [TX6]  14.22,29.34 0 bottom
U$16  [V8]  14.35,18.92 0 bottom
U$17  [#EVENTA#0]  62.74,12.32 270 bottom
U$18  [COM30]  16.26,28.32 270 bottom
U$19  [MOSAIC#X50]  67.56,36.2 0 top
U$20  [MOSAIC#X5_0]  40.77,36.07 0 bottom
U$21  [TIME0]  65.28,17.65 0 top
U$22  [G1]  13.59,24 0 bottom
U$23  [3V30]  55.88,38.61 0 bottom
U$24  [5V0]  49.66,38.61 0 bottom
U$25  [PULSE1]  69.22,17.65 0 top
U$26  [#ANT_V#0]  52.7,40.39 0 bottom
U$27  [#RTK_LED#0]  57.66,46.23 0 bottom
U$28  [RTK0]  64.01,49.28 0 top
U$29  [PVT0]  64.14,51.05 0 top
U$30  [#GP1_#0]  50.04,10.41 270 bottom
U$31  [LOG0]  19.69,51.05 0 top
U$32  [PULSE1]  135.76,17.65 0 top
U$33  [#GP2_#0]  52.58,10.54 270 bottom
U$34  [#PPS_#0]  60.2,10.41 270 bottom
U$35  [#LOG_BTN#0]  57.66,12.95 270 bottom
U$36  [#LOG_L#0]  47.5,52.7 90 top
U$37  [#RDY#0]  42.42,53.59 270 bottom
U$38  [#GP_LED#0]  44.96,52.07 270 bottom
U$39  [#LOG_LED#0]  47.5,51.56 270 bottom
U$40  [#PMIC#0]  50.04,53.34 270 bottom
U$41  [#RTS#0]  29.72,10.67 270 bottom
U$42  [#RTS#0]  39.88,10.67 270 bottom
U$43  [#RTK_#0]  55.12,10.54 270 bottom
U$44  [#EVENTB#0]  65.28,12.32 270 bottom
U$46  [L1#2#50]  135,48.51 0 top
U$47  [_ACTIVE_ANT1]  133.22,47.24 0 top
U$48  [RST0]  93.73,19.56 90 top
U$49  [LOG0]  86.23,51.05 0 top
U$50  [LOG2]  130.56,52.83 0 top
U$51  [PPS0]  130.43,54.61 0 top
U$52  [PWR3]  130.68,56.39 0 top
U$53  [COM30]  82.3,28.45 90 top
U$54  [COM20]  103.89,14.48 0 top
U$55  [COM10]  93.73,14.48 0 top
U$56  [COM40]  112.78,14.48 0 top
U$57  [#3#3V#1]  88.65,11.05 90 top
U$58  [#CTS#4]  98.81,10.79 90 top
U$59  [#GND#0]  86.11,10.92 90 top
U$60  [#RTS#5]  96.27,10.79 90 top
U$61  [#RX#2]  91.19,10.41 90 top
U$62  [#TX#3]  93.73,10.41 90 top
U$63  [#3#3V#1]  88.65,10.92 270 bottom
U$64  [#CTS_#4]  98.81,10.54 270 bottom
U$65  [#GND#0]  86.11,10.79 270 bottom
U$66  [#RX_#2]  91.19,10.03 270 bottom
U$67  [#TX_#3]  93.73,10.16 270 bottom
U$68  [#CTS#4]  108.97,10.79 90 top
U$69  [L1#2#50]  68.45,48.51 0 top
U$70  [#RTS#5]  106.43,10.79 90 top
U$71  [#RX#2]  101.35,10.41 90 top
U$72  [#TX#3]  103.89,10.41 90 top
U$73  [#CTS_#4]  108.97,10.54 270 bottom
U$74  [#RX_#2]  101.35,10.03 270 bottom
U$75  [#TX_#3]  103.89,10.16 270 bottom
U$76  [#RX#2]  111.51,10.41 90 top
U$77  [#TX#3]  114.05,10.41 90 top
U$78  [#RX_#2]  111.51,10.03 270 bottom
U$79  [LOG2]  64.01,52.83 0 top
U$80  [PPS0]  63.88,54.61 0 top
U$81  [PWR3]  64.14,56.39 0 top
U$82  [COM30]  15.75,28.45 90 top
U$83  [COM20]  37.34,14.48 0 top
U$84  [COM10]  27.18,14.48 0 top
U$85  [COM40]  46.23,14.48 0 top
U$86  [#TX_#3]  114.05,10.16 270 bottom
U$87  [#3#3V#1]  22.1,11.05 90 top
U$88  [#CTS#4]  32.26,10.79 90 top
U$89  [#GND#0]  19.56,10.92 90 top
U$90  [#RTS#5]  29.72,10.79 90 top
U$91  [#RX#2]  24.64,10.41 90 top
U$92  [#TX#3]  27.18,10.41 90 top
U$93  [#3#3V#1]  22.1,10.92 270 bottom
U$94  [#CTS_#4]  32.26,10.54 270 bottom
U$95  [#GND#0]  19.56,10.79 270 bottom
U$96  [COM20]  105.16,14.48 0 bottom
U$97  [#RX_#2]  24.64,10.03 270 bottom
U$98  [#TX_#3]  27.18,10.16 270 bottom
U$99  [COM20]  38.61,14.48 0 bottom
U$100  [#CTS#4]  42.42,10.79 90 top
U$101  [#RTS#5]  39.88,10.79 90 top
U$102  [#RX#2]  34.8,10.41 90 top
U$103  [#TX#3]  37.34,10.41 90 top
U$104  [#CTS_#4]  42.42,10.54 270 bottom
U$105  [COM40]  112.78,14.48 0 bottom
U$106  [#RX_#2]  34.8,10.03 270 bottom
U$107  [#TX_#3]  37.34,10.16 270 bottom
U$108  [COM40]  46.23,14.48 0 bottom
U$109  [COM10]  28.32,14.48 0 bottom
U$110  [#3#3V#1]  29.72,53.59 90 top
U$111  [#RX#2]  44.96,10.41 90 top
U$112  [#TX#3]  47.5,10.41 90 top
U$113  [#GND#0]  27.18,53.72 90 top
U$114  [#3#3V#1]  29.72,53.47 270 bottom
U$115  [#RX_#2]  44.96,10.03 270 bottom
U$116  [#TX_#3]  47.5,10.16 270 bottom
U$117  [#GND#0]  27.18,53.59 270 bottom
U$118  [##RST##2]  39.88,53.85 90 top
U$119  [#GP_LED#4]  44.96,52.2 90 top
U$120  [COM10]  94.87,14.48 0 bottom
U$121  [#PMIC#6]  50.04,53.47 90 top
U$122  [#RDY#3]  42.42,53.72 90 top
U$123  [#VIN#1]  32.26,53.85 90 top
U$124  [#VUSB#0]  34.8,53.21 90 top
U$125  [#V_BAT#7]  37.34,52.45 90 top
U$126  [#3#3V#1]  96.27,53.59 90 top
U$127  [#GND#0]  93.73,53.72 90 top
U$128  [#3#3V#1]  96.27,53.47 270 bottom
U$129  [#GND#0]  93.73,53.59 270 bottom
U$130  [#VIN#1]  32.26,53.85 270 bottom
U$131  [#VUSB#0]  34.8,53.09 270 bottom
U$132  [#V_BAT#7]  37.34,52.32 270 bottom
U$133  [#_#RST##2]  39.88,53.85 270 bottom
U$134  [L1#2#50]  63.37,42.42 270 bottom
U$135  [_ACTIVE_ANT1]  65.28,42.42 270 bottom
U$136  [TIME0]  63.37,22.1 270 bottom
U$137  [PULSE1]  65.28,22.1 270 bottom
U$138  [GNSS1]  67.56,31.62 0 top
U$139  [##RST##2]  106.43,53.85 90 top
U$140  [TRIBAND2]  67.56,33.91 0 top
U$141  [#LOG_LED#2]  57.66,51.69 0 bottom
U$142  [#PPS_LED#1]  57.53,53.97 0 bottom
U$143  [#GP_LED#3]  57.15,49.28 0 bottom
U$144  [#PWR_LED#0]  57.78,56.39 0 bottom
U$145  [#V_BAT#4]  56.9,43.69 0 bottom
U$146  [#A#8]  62.74,9.91 90 top
U$147  [#B#10]  65.28,9.78 90 top
U$148  [#GP_LED#4]  111.51,52.2 90 top
U$149  [#PMIC#6]  116.59,53.47 90 top
U$150  [#GP1#0]  50.04,10.67 90 top
U$151  [#RDY#3]  108.97,53.72 90 top
U$152  [#GP2#1]  52.58,10.79 90 top
U$153  [#VIN#1]  98.81,53.85 90 top
U$154  [#LOG#4]  57.66,10.92 90 top
U$155  [#VUSB#0]  101.35,53.21 90 top
U$156  [#PPS#6]  60.2,10.67 90 top
U$157  [#V_BAT#7]  103.89,52.45 90 top
U$158  [#VIN#1]  98.81,53.85 270 bottom
U$159  [#VUSB#0]  101.35,53.09 270 bottom
U$160  [#V_BAT#7]  103.89,52.32 270 bottom
U$161  [#_#RST##2]  106.43,53.85 270 bottom
U$162  [L1#2#50]  129.92,42.42 270 bottom
U$163  [_ACTIVE_ANT1]  131.83,42.42 270 bottom
U$164  [TIME0]  129.92,22.1 270 bottom
U$165  [PULSE1]  131.83,22.1 270 bottom
U$166  [GNSS1]  134.11,31.62 0 top
U$167  [TRIBAND2]  134.11,33.91 0 top
U$168  [#GP_LED#3]  123.7,49.28 0 bottom
U$169  [#LOG_LED#2]  124.21,51.69 0 bottom
U$170  [#PPS_LED#1]  124.08,53.97 0 bottom
U$171  [#PWR_LED#0]  124.33,56.39 0 bottom
U$172  [#V_BAT#4]  123.44,43.69 0 bottom
U$173  [#A#8]  129.29,9.91 90 top
U$174  [#B#10]  131.83,9.78 90 top
U$175  [#GP1#0]  116.59,10.67 90 top
U$176  [#GP2#1]  119.13,10.79 90 top
U$177  [#LOG#4]  124.21,10.92 90 top
U$178  [#PPS#6]  126.75,10.67 90 top
U$179  [GNSS_1]  107.31,28.45 0 bottom
U$180  [TRIBAND_2]  107.19,32.26 0 bottom
U$181  [MEAS0]  90.55,28.45 270 bottom
U$182  [C4]  80.14,27.56 0 bottom
U$183  [D#2]  80.52,17.65 0 bottom
U$184  [D#3]  80.52,16.38 0 bottom
U$185  [G0]  80.9,15.11 0 bottom
U$186  [R5]  80.14,25.78 0 bottom
U$187  [RX7]  80.64,31.12 0 bottom
U$188  [TX6]  80.77,29.34 0 bottom
U$189  [V8]  80.9,18.92 0 bottom
U$190  [COM30]  82.8,28.32 270 bottom
U$191  [MOSAIC#X50]  134.11,36.2 0 top
U$192  [MOSAIC#X5_0]  107.31,36.07 0 bottom
U$193  [V0]  80.14,32.89 0 bottom
U$194  [G1]  80.14,24 0 bottom
U$195  [#RTK#0]  121.67,10.79 90 top
U$196  [3V30]  122.43,38.61 0 bottom
U$197  [5V0]  116.2,38.61 0 bottom
U$198  [#ANT_V#0]  119.25,40.39 0 bottom
U$199  [#RTK_LED#0]  124.21,46.23 0 bottom
U$200  [RTK0]  130.56,49.28 0 top
U$201  [PVT0]  130.68,51.05 0 top
U$202  [#GP1_#0]  116.59,10.41 270 bottom
U$203  [#GP2_#0]  119.13,10.54 270 bottom
U$204  [#PPS_#0]  126.75,10.41 270 bottom
U$205  [#LOG_BTN#0]  124.21,12.95 270 bottom
U$206  [#LOG_L#0]  114.05,52.7 90 top
U$207  [#RDY#0]  108.97,53.59 270 bottom
U$208  [#GP_LED#0]  111.51,52.07 270 bottom
U$209  [#LOG_LED#0]  114.05,51.56 270 bottom
U$210  [#PMIC#0]  116.59,53.34 270 bottom
U$211  [#RTS#0]  96.27,10.67 270 bottom
U$212  [#RTS#0]  106.43,10.67 270 bottom
U$213  [#RTK_#0]  121.67,10.54 270 bottom
U$214  [#EVENTA#0]  129.29,12.32 270 bottom
U$215  [#EVENTB#0]  131.83,12.32 270 bottom
U$217  [TIME0]  65.28,68.96 0 top
U$218  [PULSE1]  69.22,68.96 0 top
U$219  [L1#2#50]  68.45,99.82 0 top
U$220  [_ACTIVE_ANT1]  66.67,98.55 0 top
U$221  [RST0]  27.18,70.87 90 top
U$222  [LOG0]  19.69,102.36 0 top
U$223  [LOG2]  64.01,104.14 0 top
U$224  [PPS0]  63.88,105.92 0 top
U$225  [PWR3]  64.14,107.7 0 top
U$226  [COM30]  15.75,79.76 90 top
U$227  [COM20]  37.34,65.79 0 top
U$228  [COM10]  27.18,65.79 0 top
U$229  [COM40]  46.23,65.79 0 top
U$230  [#3#3V#1]  22.1,62.36 90 top
U$231  [#CTS#4]  32.26,62.1 90 top
U$232  [#GND#0]  19.56,62.23 90 top
U$233  [#RTS#5]  29.72,62.1 90 top
U$234  [#RX#2]  24.64,61.72 90 top
U$235  [#TX#3]  27.18,61.72 90 top
U$236  [#3#3V#1]  22.1,62.23 270 bottom
U$237  [#CTS_#4]  32.26,61.85 270 bottom
U$238  [#GND#0]  19.56,62.1 270 bottom
U$239  [#RX_#2]  24.64,61.34 270 bottom
U$240  [#TX_#3]  27.18,61.47 270 bottom
U$241  [#CTS#4]  42.42,62.1 90 top
U$242  [#RTS#5]  39.88,62.1 90 top
U$243  [#RX#2]  34.8,61.72 90 top
U$244  [#TX#3]  37.34,61.72 90 top
U$245  [#CTS_#4]  42.42,61.85 270 bottom
U$246  [#RX_#2]  34.8,61.34 270 bottom
U$247  [#TX_#3]  37.34,61.47 270 bottom
U$248  [#RX#2]  44.96,61.72 90 top
U$249  [#TX#3]  47.5,61.72 90 top
U$250  [#RX_#2]  44.96,61.34 270 bottom
U$251  [#TX_#3]  47.5,61.47 270 bottom
U$252  [COM20]  38.61,65.79 0 bottom
U$253  [COM40]  46.23,65.79 0 bottom
U$254  [COM10]  28.32,65.79 0 bottom
U$255  [#3#3V#1]  29.72,104.9 90 top
U$256  [#GND#0]  27.18,105.03 90 top
U$257  [#3#3V#1]  29.72,104.78 270 bottom
U$258  [#GND#0]  27.18,104.9 270 bottom
U$259  [##RST##2]  39.88,105.16 90 top
U$260  [#GP_LED#4]  44.96,103.51 90 top
U$261  [#PMIC#6]  50.04,104.78 90 top
U$262  [#RDY#3]  42.42,105.03 90 top
U$263  [#VIN#1]  32.26,105.16 90 top
U$264  [#VUSB#0]  34.8,104.52 90 top
U$265  [#V_BAT#7]  37.34,103.76 90 top
U$266  [#VIN#1]  32.26,105.16 270 bottom
U$267  [#VUSB#0]  34.8,104.39 270 bottom
U$268  [#V_BAT#7]  37.34,103.63 270 bottom
U$269  [#_#RST##2]  39.88,105.16 270 bottom
U$270  [L1#2#50]  63.37,93.73 270 bottom
U$271  [_ACTIVE_ANT1]  65.28,93.73 270 bottom
U$272  [TIME0]  63.37,73.41 270 bottom
U$273  [PULSE1]  65.28,73.41 270 bottom
U$274  [GNSS1]  67.56,82.93 0 top
U$275  [TRIBAND2]  67.56,85.22 0 top
U$276  [#GP_LED#3]  57.15,100.58 0 bottom
U$277  [#LOG_LED#2]  57.66,103 0 bottom
U$278  [#PPS_LED#1]  57.53,105.28 0 bottom
U$279  [#PWR_LED#0]  57.78,107.7 0 bottom
U$280  [#V_BAT#4]  56.9,95 0 bottom
U$281  [#A#8]  62.74,61.21 90 top
U$282  [#B#10]  65.28,61.09 90 top
U$283  [#GP1#0]  50.04,61.98 90 top
U$284  [#GP2#1]  52.58,62.1 90 top
U$285  [#LOG#4]  57.66,62.23 90 top
U$286  [#PPS#6]  60.2,61.98 90 top
U$287  [GNSS_1]  40.77,79.76 0 bottom
U$288  [TRIBAND_2]  40.64,83.57 0 bottom
U$289  [MEAS0]  24,79.76 270 bottom
U$290  [C4]  13.59,78.87 0 bottom
U$291  [D#2]  13.97,68.96 0 bottom
U$292  [D#3]  13.97,67.69 0 bottom
U$293  [G0]  14.35,66.42 0 bottom
U$294  [R5]  13.59,77.09 0 bottom
U$295  [RX7]  14.1,82.42 0 bottom
U$296  [TX6]  14.22,80.65 0 bottom
U$297  [V8]  14.35,70.23 0 bottom
U$298  [COM30]  16.26,79.63 270 bottom
U$299  [MOSAIC#X50]  67.56,87.5 0 top
U$300  [MOSAIC#X5_0]  40.77,87.38 0 bottom
U$301  [V0]  13.59,84.2 0 bottom
U$302  [G1]  13.59,75.31 0 bottom
U$303  [#RTK#0]  55.12,62.1 90 top
U$304  [3V30]  55.88,89.92 0 bottom
U$305  [5V0]  49.66,89.92 0 bottom
U$306  [#ANT_V#0]  52.7,91.69 0 bottom
U$307  [#RTK_LED#0]  57.66,97.54 0 bottom
U$308  [RTK0]  64.01,100.58 0 top
U$309  [PVT0]  64.14,102.36 0 top
U$310  [#GP1_#0]  50.04,61.72 270 bottom
U$311  [#GP2_#0]  52.58,61.85 270 bottom
U$312  [#PPS_#0]  60.2,61.72 270 bottom
U$313  [#LOG_BTN#0]  57.66,64.26 270 bottom
U$314  [#LOG_L#0]  47.5,104.01 90 top
U$315  [#RDY#0]  42.42,104.9 270 bottom
U$316  [#GP_LED#0]  44.96,103.38 270 bottom
U$317  [#LOG_LED#0]  47.5,102.87 270 bottom
U$318  [#PMIC#0]  50.04,104.65 270 bottom
U$319  [#RTS#0]  29.72,61.98 270 bottom
U$320  [#RTS#0]  39.88,61.98 270 bottom
U$321  [#RTK_#0]  55.12,61.85 270 bottom
U$322  [#EVENTA#0]  62.74,63.63 270 bottom
U$323  [#EVENTB#0]  65.28,63.63 270 bottom
U$325  [TIME0]  131.83,68.96 0 top
U$326  [PULSE1]  135.76,68.96 0 top
U$327  [L1#2#50]  135,99.82 0 top
U$328  [_ACTIVE_ANT1]  133.22,98.55 0 top
U$329  [RST0]  93.73,70.87 90 top
U$330  [LOG0]  86.23,102.36 0 top
U$331  [LOG2]  130.56,104.14 0 top
U$332  [PPS0]  130.43,105.92 0 top
U$333  [PWR3]  130.68,107.7 0 top
U$334  [COM30]  82.3,79.76 90 top
U$335  [COM20]  103.89,65.79 0 top
U$336  [COM10]  93.73,65.79 0 top
U$337  [COM40]  112.78,65.79 0 top
U$338  [#3#3V#1]  88.65,62.36 90 top
U$339  [#CTS#4]  98.81,62.1 90 top
U$340  [#GND#0]  86.11,62.23 90 top
U$341  [#RTS#5]  96.27,62.1 90 top
U$342  [#RX#2]  91.19,61.72 90 top
U$343  [#TX#3]  93.73,61.72 90 top
U$344  [#3#3V#1]  88.65,62.23 270 bottom
U$345  [#CTS_#4]  98.81,61.85 270 bottom
U$346  [#GND#0]  86.11,62.1 270 bottom
U$347  [#RX_#2]  91.19,61.34 270 bottom
U$348  [#TX_#3]  93.73,61.47 270 bottom
U$349  [#CTS#4]  108.97,62.1 90 top
U$350  [#RTS#5]  106.43,62.1 90 top
U$351  [#RX#2]  101.35,61.72 90 top
U$352  [#TX#3]  103.89,61.72 90 top
U$353  [#CTS_#4]  108.97,61.85 270 bottom
U$354  [#RX_#2]  101.35,61.34 270 bottom
U$355  [#TX_#3]  103.89,61.47 270 bottom
U$356  [#RX#2]  111.51,61.72 90 top
U$357  [#TX#3]  114.05,61.72 90 top
U$358  [#RX_#2]  111.51,61.34 270 bottom
U$359  [#TX_#3]  114.05,61.47 270 bottom
U$360  [COM20]  105.16,65.79 0 bottom
U$361  [COM40]  112.78,65.79 0 bottom
U$362  [COM10]  94.87,65.79 0 bottom
U$363  [#3#3V#1]  96.27,104.9 90 top
U$364  [#GND#0]  93.73,105.03 90 top
U$365  [#3#3V#1]  96.27,104.78 270 bottom
U$366  [#GND#0]  93.73,104.9 270 bottom
U$367  [##RST##2]  106.43,105.16 90 top
U$368  [#GP_LED#4]  111.51,103.51 90 top
U$369  [#PMIC#6]  116.59,104.78 90 top
U$370  [#RDY#3]  108.97,105.03 90 top
U$371  [#VIN#1]  98.81,105.16 90 top
U$372  [#VUSB#0]  101.35,104.52 90 top
U$373  [#V_BAT#7]  103.89,103.76 90 top
U$374  [#VIN#1]  98.81,105.16 270 bottom
U$375  [#VUSB#0]  101.35,104.39 270 bottom
U$376  [#V_BAT#7]  103.89,103.63 270 bottom
U$377  [#_#RST##2]  106.43,105.16 270 bottom
U$378  [L1#2#50]  129.92,93.73 270 bottom
U$379  [_ACTIVE_ANT1]  131.83,93.73 270 bottom
U$380  [TIME0]  129.92,73.41 270 bottom
U$381  [PULSE1]  131.83,73.41 270 bottom
U$382  [GNSS1]  134.11,82.93 0 top
U$383  [TRIBAND2]  134.11,85.22 0 top
U$384  [#GP_LED#3]  123.7,100.58 0 bottom
U$385  [#LOG_LED#2]  124.21,103 0 bottom
U$386  [#PPS_LED#1]  124.08,105.28 0 bottom
U$387  [#PWR_LED#0]  124.33,107.7 0 bottom
U$388  [#V_BAT#4]  123.44,95 0 bottom
U$389  [#A#8]  129.29,61.21 90 top
U$390  [#B#10]  131.83,61.09 90 top
U$391  [#GP1#0]  116.59,61.98 90 top
U$392  [#GP2#1]  119.13,62.1 90 top
U$393  [#LOG#4]  124.21,62.23 90 top
U$394  [#PPS#6]  126.75,61.98 90 top
U$395  [GNSS_1]  107.31,79.76 0 bottom
U$396  [TRIBAND_2]  107.19,83.57 0 bottom
U$397  [MEAS0]  90.55,79.76 270 bottom
U$398  [C4]  80.14,78.87 0 bottom
U$399  [D#2]  80.52,68.96 0 bottom
U$400  [D#3]  80.52,67.69 0 bottom
U$401  [G0]  80.9,66.42 0 bottom
U$402  [R5]  80.14,77.09 0 bottom
U$403  [RX7]  80.64,82.42 0 bottom
U$404  [TX6]  80.77,80.65 0 bottom
U$405  [V8]  80.9,70.23 0 bottom
U$406  [COM30]  82.8,79.63 270 bottom
U$407  [MOSAIC#X50]  134.11,87.5 0 top
U$408  [MOSAIC#X5_0]  107.31,87.38 0 bottom
U$409  [V0]  80.14,84.2 0 bottom
U$410  [G1]  80.14,75.31 0 bottom
U$411  [#RTK#0]  121.67,62.1 90 top
U$412  [3V30]  122.43,89.92 0 bottom
U$413  [5V0]  116.2,89.92 0 bottom
U$414  [#ANT_V#0]  119.25,91.69 0 bottom
U$415  [#RTK_LED#0]  124.21,97.54 0 bottom
U$416  [RTK0]  130.56,100.58 0 top
U$417  [PVT0]  130.68,102.36 0 top
U$418  [#GP1_#0]  116.59,61.72 270 bottom
U$419  [#GP2_#0]  119.13,61.85 270 bottom
U$420  [#PPS_#0]  126.75,61.72 270 bottom
U$421  [#LOG_BTN#0]  124.21,64.26 270 bottom
U$422  [#LOG_L#0]  114.05,104.01 90 top
U$423  [#RDY#0]  108.97,104.9 270 bottom
U$424  [#GP_LED#0]  111.51,103.38 270 bottom
U$425  [#LOG_LED#0]  114.05,102.87 270 bottom
U$426  [#PMIC#0]  116.59,104.65 270 bottom
U$427  [#RTS#0]  96.27,61.98 270 bottom
U$428  [#RTS#0]  106.43,61.98 270 bottom
U$429  [#RTK_#0]  121.67,61.85 270 bottom
U$430  [#EVENTA#0]  129.29,63.63 270 bottom
U$431  [#EVENTB#0]  131.83,63.63 270 bottom
VB  JUMPER-SMT_2_NC_TRACE_SILK  [SMT-JUMPER_2_NC_TRACE_SILK]  52.58,43.69 0 bottom
VB1  JUMPER-SMT_2_NC_TRACE_SILK  [SMT-JUMPER_2_NC_TRACE_SILK]  119.13,43.69 0 bottom
VB2  JUMPER-SMT_2_NC_TRACE_SILK  [SMT-JUMPER_2_NC_TRACE_SILK]  52.58,95 0 bottom
VB3  JUMPER-SMT_2_NC_TRACE_SILK  [SMT-JUMPER_2_NC_TRACE_SILK]  119.13,95 0 bottom

## Library data of the parts
ANT_V ANT_V1-ANT_V3 GP1-GP8 LOG LOG1-LOG3 MEAS MEAS1-MEAS3 PPS PPS1-PPS3 PWR PWR1-PWR3 TP1-TP4 VB VB1-VB3 = SparkFun-Jumpers
C1 C3 C10 C14 C17 C20 C26 C27 C30 C36 C37 C40 = SparkFun-Capacitors; PROD_ID: CAP-11015
C2 C7 C11 C13 C21 C23 C31 C33 = SparkFun-Capacitors; PROD_ID: CAP-00868
C4 C6 C9 C12 C15 C19 C22 C25 C28 C32 C35 C38 = SparkFun-Capacitors; PROD_ID: CAP-08604
C5 C16 C29 C39 = SparkFun-Capacitors; PROD_ID: CAP-14464
C8 C18 C24 C34 = SparkFun-Capacitors; PROD_ID: CAP-07888
D1 D19 D33 D47 = SparkFun-DiscreteSemi; PROD_ID: IC-13538
D2 D23 D37 D51 = SparkFun-LED; PROD_ID: DIO-09004
D3 D6 D20 D21 D34 D35 D48 D49 = SparkFun-DiscreteSemi; PROD_ID: DIO-14072
D4 D16 D30 D44 = SparkFun-LED; PROD_ID: DIO-09003
D5 D18 D32 D46 = SparkFun-LED; PROD_ID: DIO-00821
D7 D17 D31 D45 = SparkFun-LED; PROD_ID: DIO-00819
D8 D22 D36 D50 = SparkFun-LED; PROD_ID: DIO-08575
D9 D11-D14 D24-D28 D38-D42 D52-D56 = SparkFun-DiscreteSemi; PROD_ID: DIO-19494
D10 D15 D29 D43 = SparkFun-DiscreteSemi; PROD_ID: DIO-15359
E1-E8 = SparkFun-RF; PROD_ID: CONN-08289
E$1-E$4 JP2-JP5 JP7-JP10 JP12-JP15 JP21 JP61 JP71 JP81 LOGO1-LOGO12 = SparkFun-Aesthetics
E$5 E$6 = SparkFun-Retired
F1-F4 = SparkFun-Fuses; PROD_ID: RES-13945
H1-H16 = SparkFun-Hardware
J1 J4 J6-J9 J11 J12 J15-J20 J22 J25-J30 J32 J35-J40 JP1 JP6 JP11 JP16 = SparkFun-Connectors
J2 J14 J24 J34 = SparkFun-Connectors; PROD_ID: CONN-16497
J3 J13 J23 J33 = SparkFun-Connectors; PROD_ID: CONN-16110
J5 J10 J21 J31 = SparkFun-Connectors; PROD_ID: CONN-14122
Q1-Q3 Q9 = SparkFun-DiscreteSemi; PROD_ID: TRANS-14399
R1-R3 R5 R14 R22-R24 R27 R34 R40-R42 R45 R54 R60-R62 R65 R72 = SparkFun-Resistors; PROD_ID: RES-00824
R4 R11 R19 R26 R31 R32 R37 R44 R46 R47 R51 R52 R57 R64 R69 R70 = SparkFun-Resistors; PROD_ID: RES-08272
R6 R7 R28 R29 R48 R49 R66 R67 = SparkFun-Resistors; PROD_ID: RES-14394
R8-R10 R20 R25 R30 R38 R43 R50 R58 R63 R68 = SparkFun-Resistors; PROD_ID: RES-07856
R12 R21 R39 R59 = SparkFun-Resistors; PROD_ID: RES-00818
R13 R33 R53 R71 = SparkFun-Resistors; PROD_ID: RES-08609
R15-R18 R35 R36 R55 R56 = SparkFun-Resistors; PROD_ID: RES-12083
S1 S3 S5 S7 = SparkFun-Switches; PROD_ID: SWCH-15606
S2 S4 S6 S8 = SparkFun-Switches; PROD_ID: SWCH-14139
T1-T4 = SparkFun-Coils; PROD_ID: COMP-19495
U1 U4 U8 U11 = Septentrio_mosaic-X5; PROD_ID: GPS-19395
U2 U6 U9 U12 = SparkFun-IC-Logic; PROD_ID: IC-11920
U3 U5 U7 U10 = SparkFun-IC-Power; PROD_ID: VREG-12457
U$1-U$44 U$46-U$215 U$217-U$323 U$325-U$431 = output